# Altium PCB YAVP.PcbDoc (part 1 of 4)
Units mil, origin at the board's own origin, x right, y up, seen from the top; angles counter-clockwise.
Board outline 3188.93 x 2893.7 mil, 6 copper layers (Top Layer, Top, Mid-Layer 1, Top-Int, Mid-Layer 2, Bop-Int, Mid-Layer 3, Top-Mid, Mid-Layer 4, Bop-Mid, Bottom Layer, Bottom); 418 components, 278 nets, 1150 pads, 440 vias.
Unrouted connection lines stored in the file: 12.
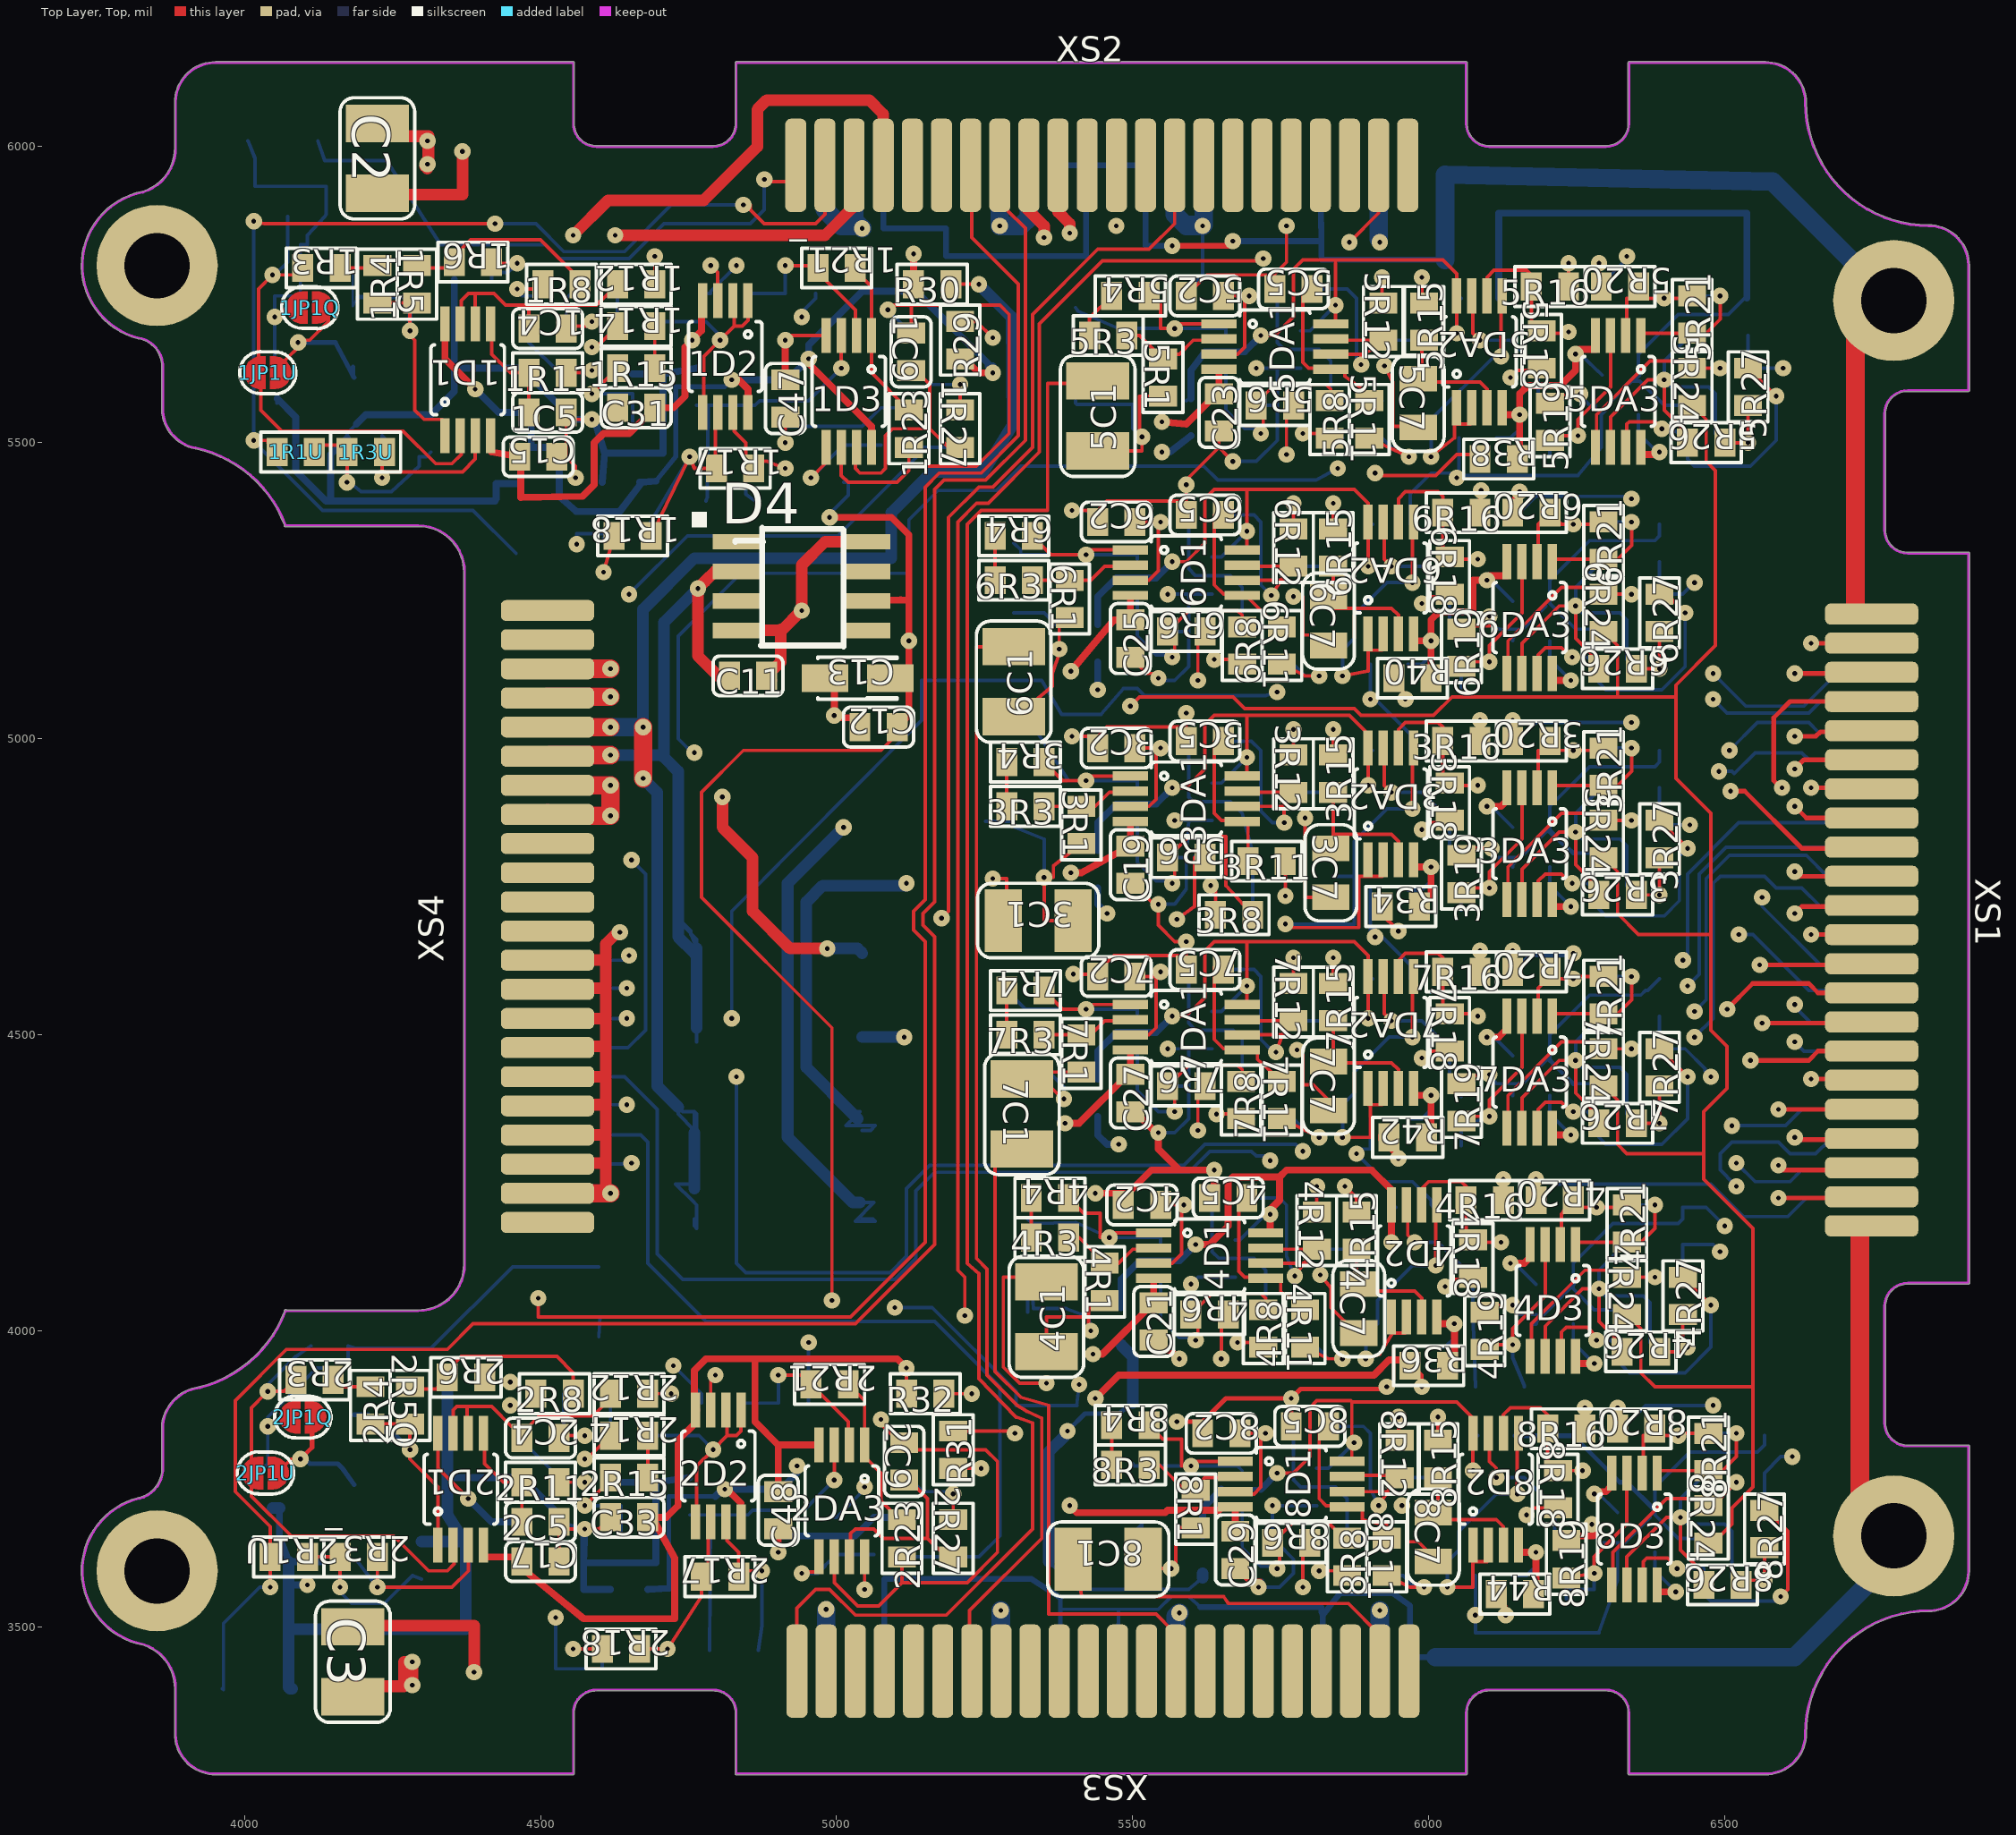
[diagram p0: Top Layer, Top view]
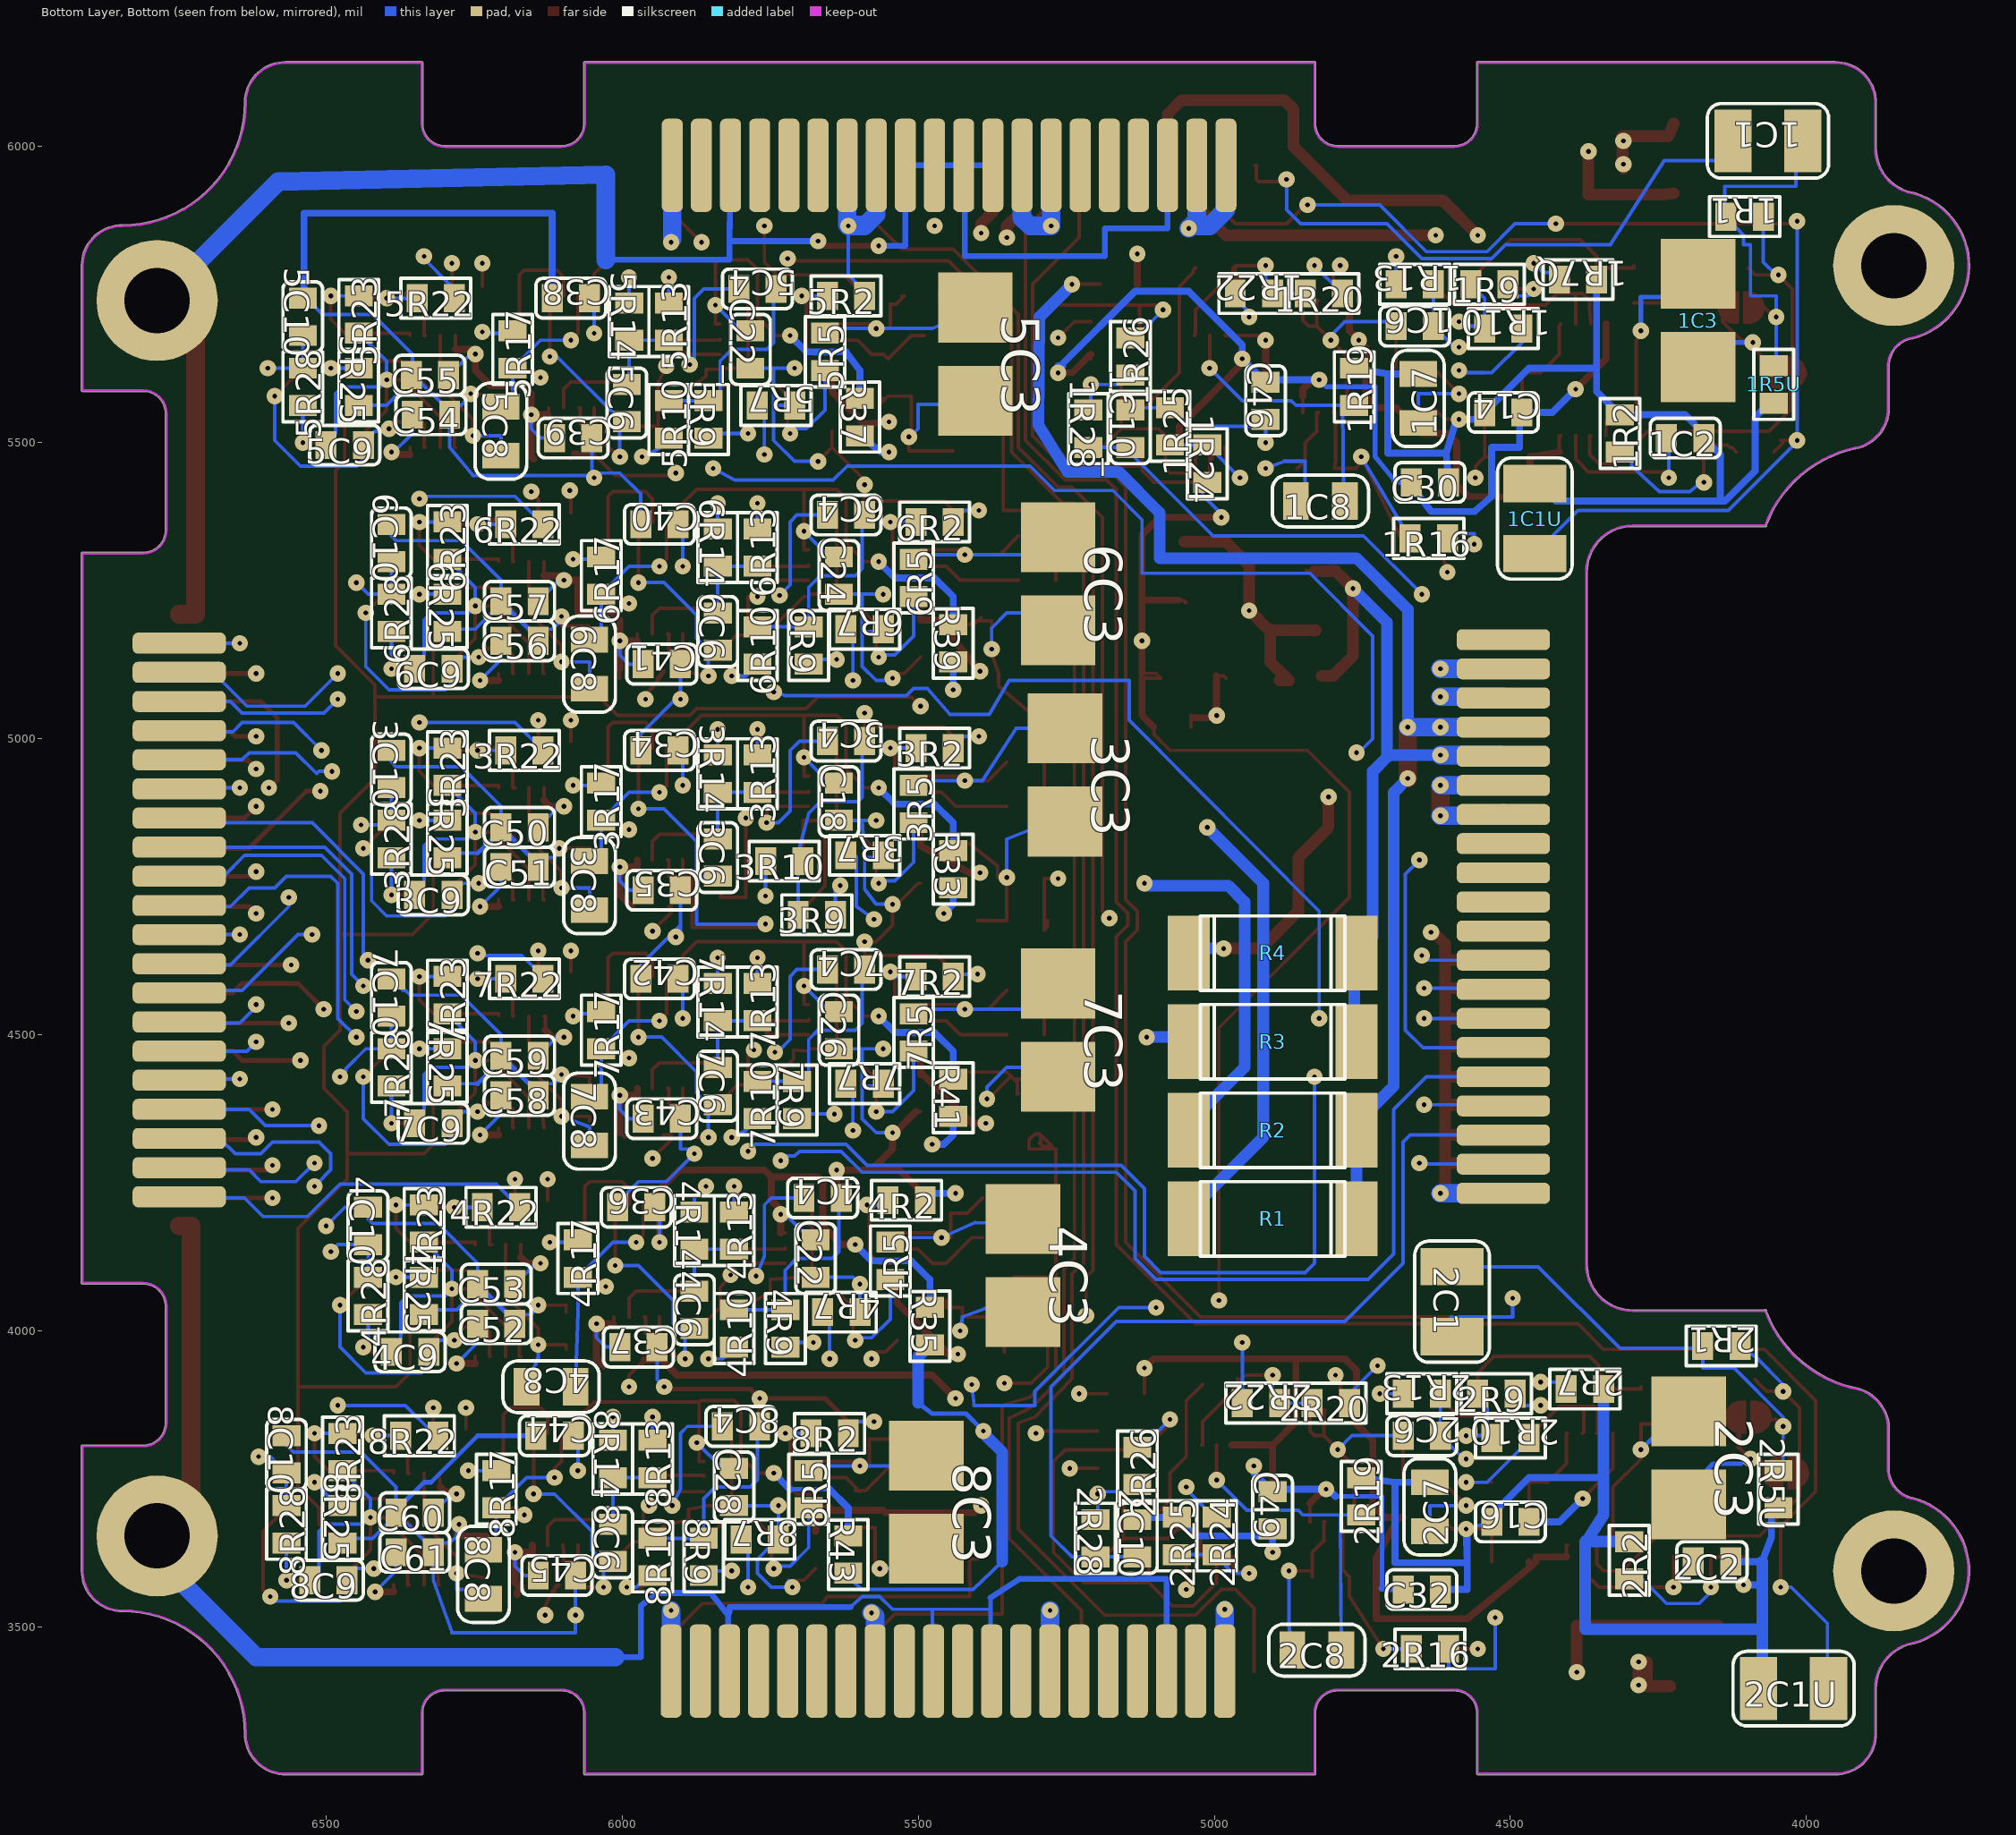
[diagram p1: Bottom Layer, Bottom view, seen from below]
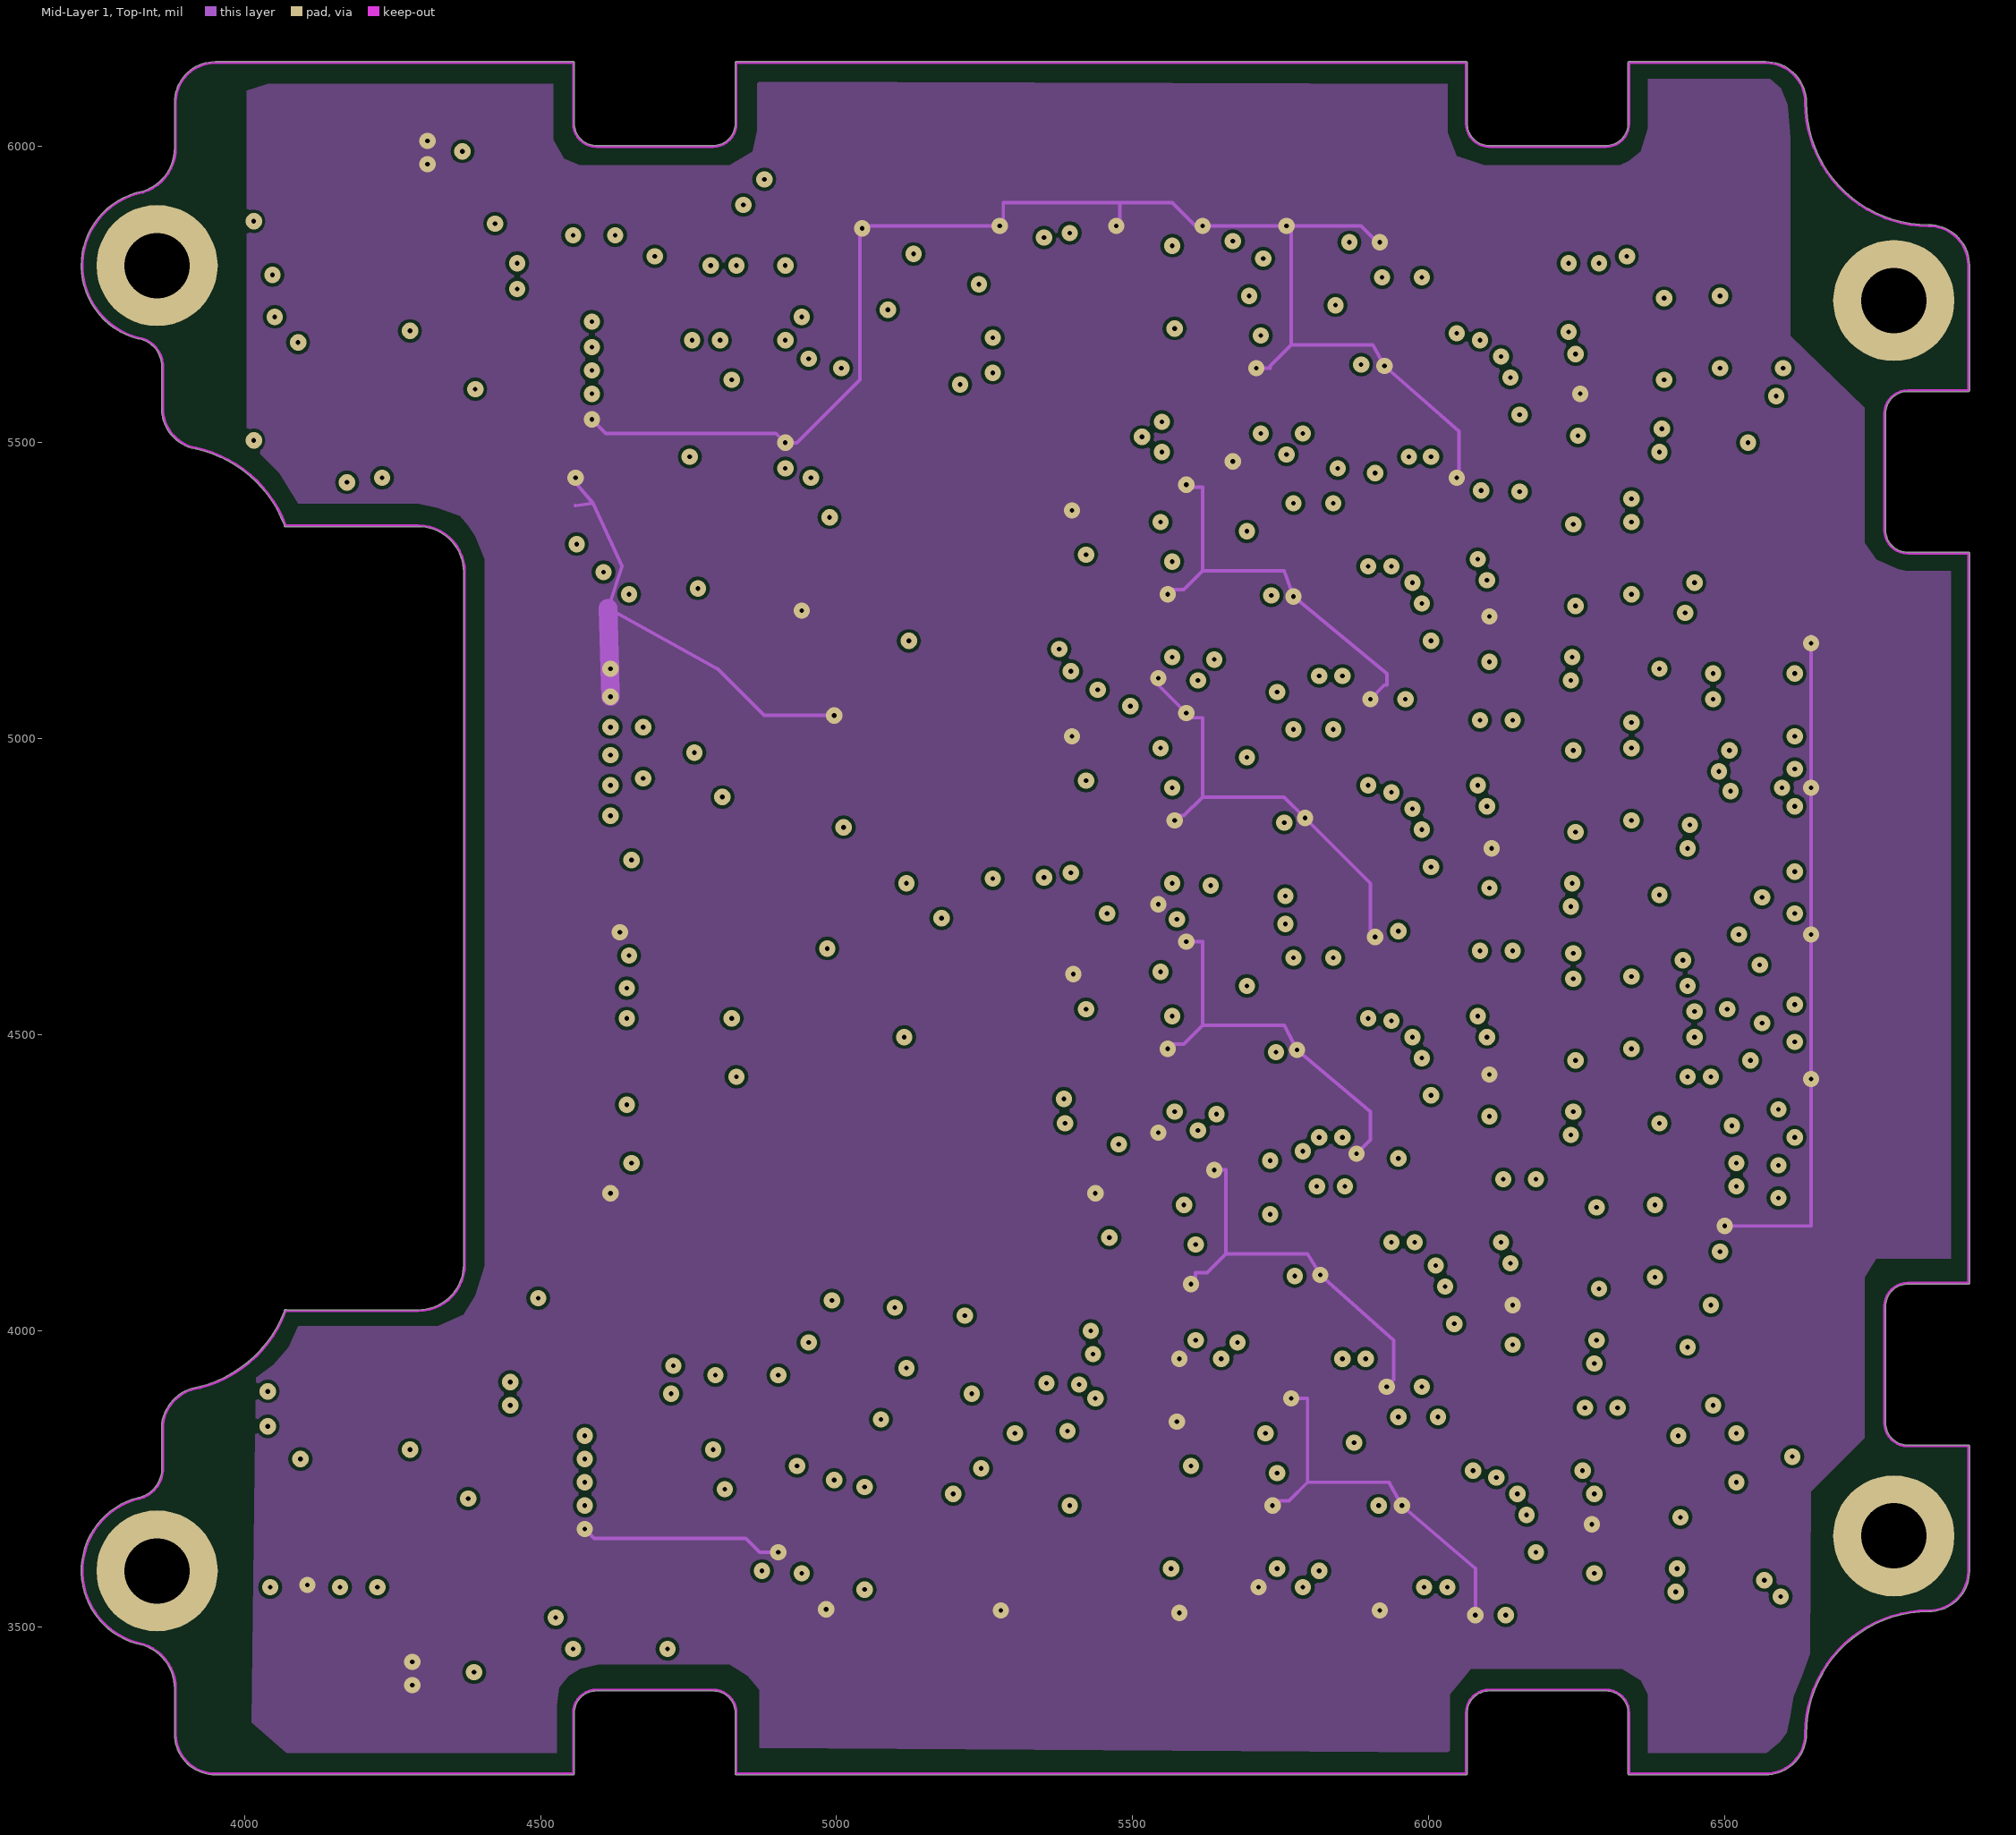
[diagram p2: Mid-Layer 1, Top-Int]
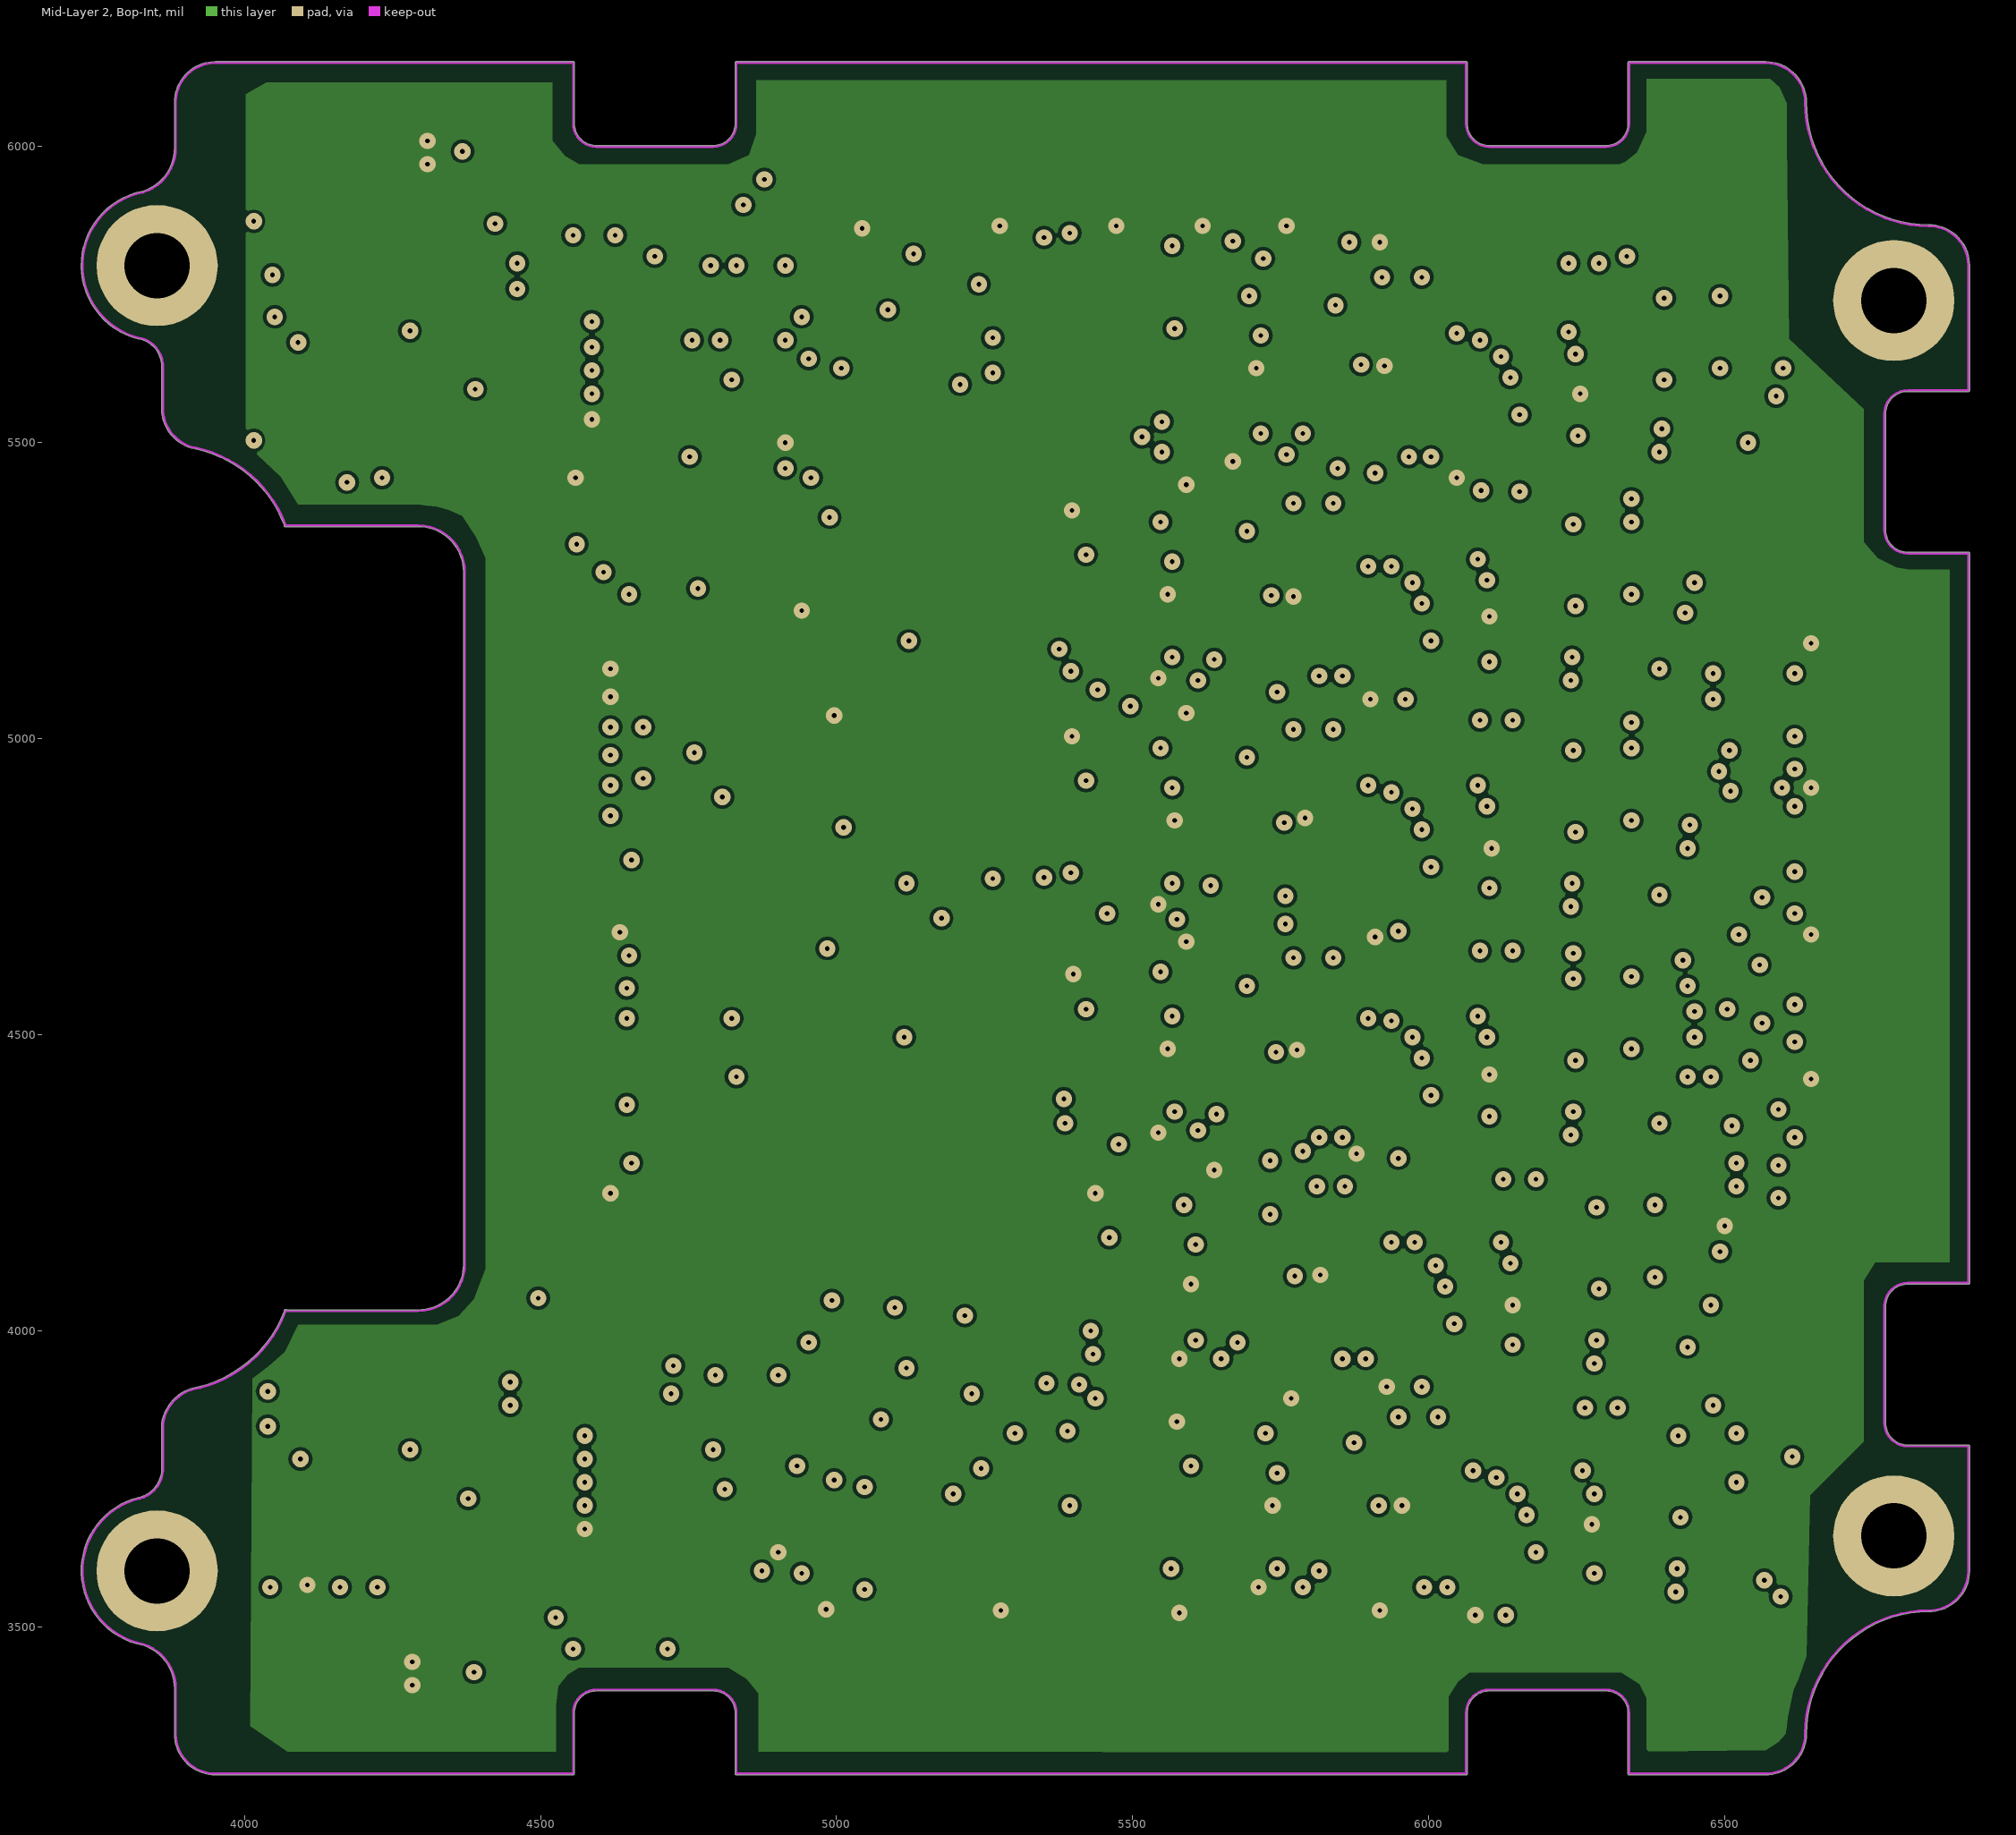
[diagram p3: Mid-Layer 2, Bop-Int]
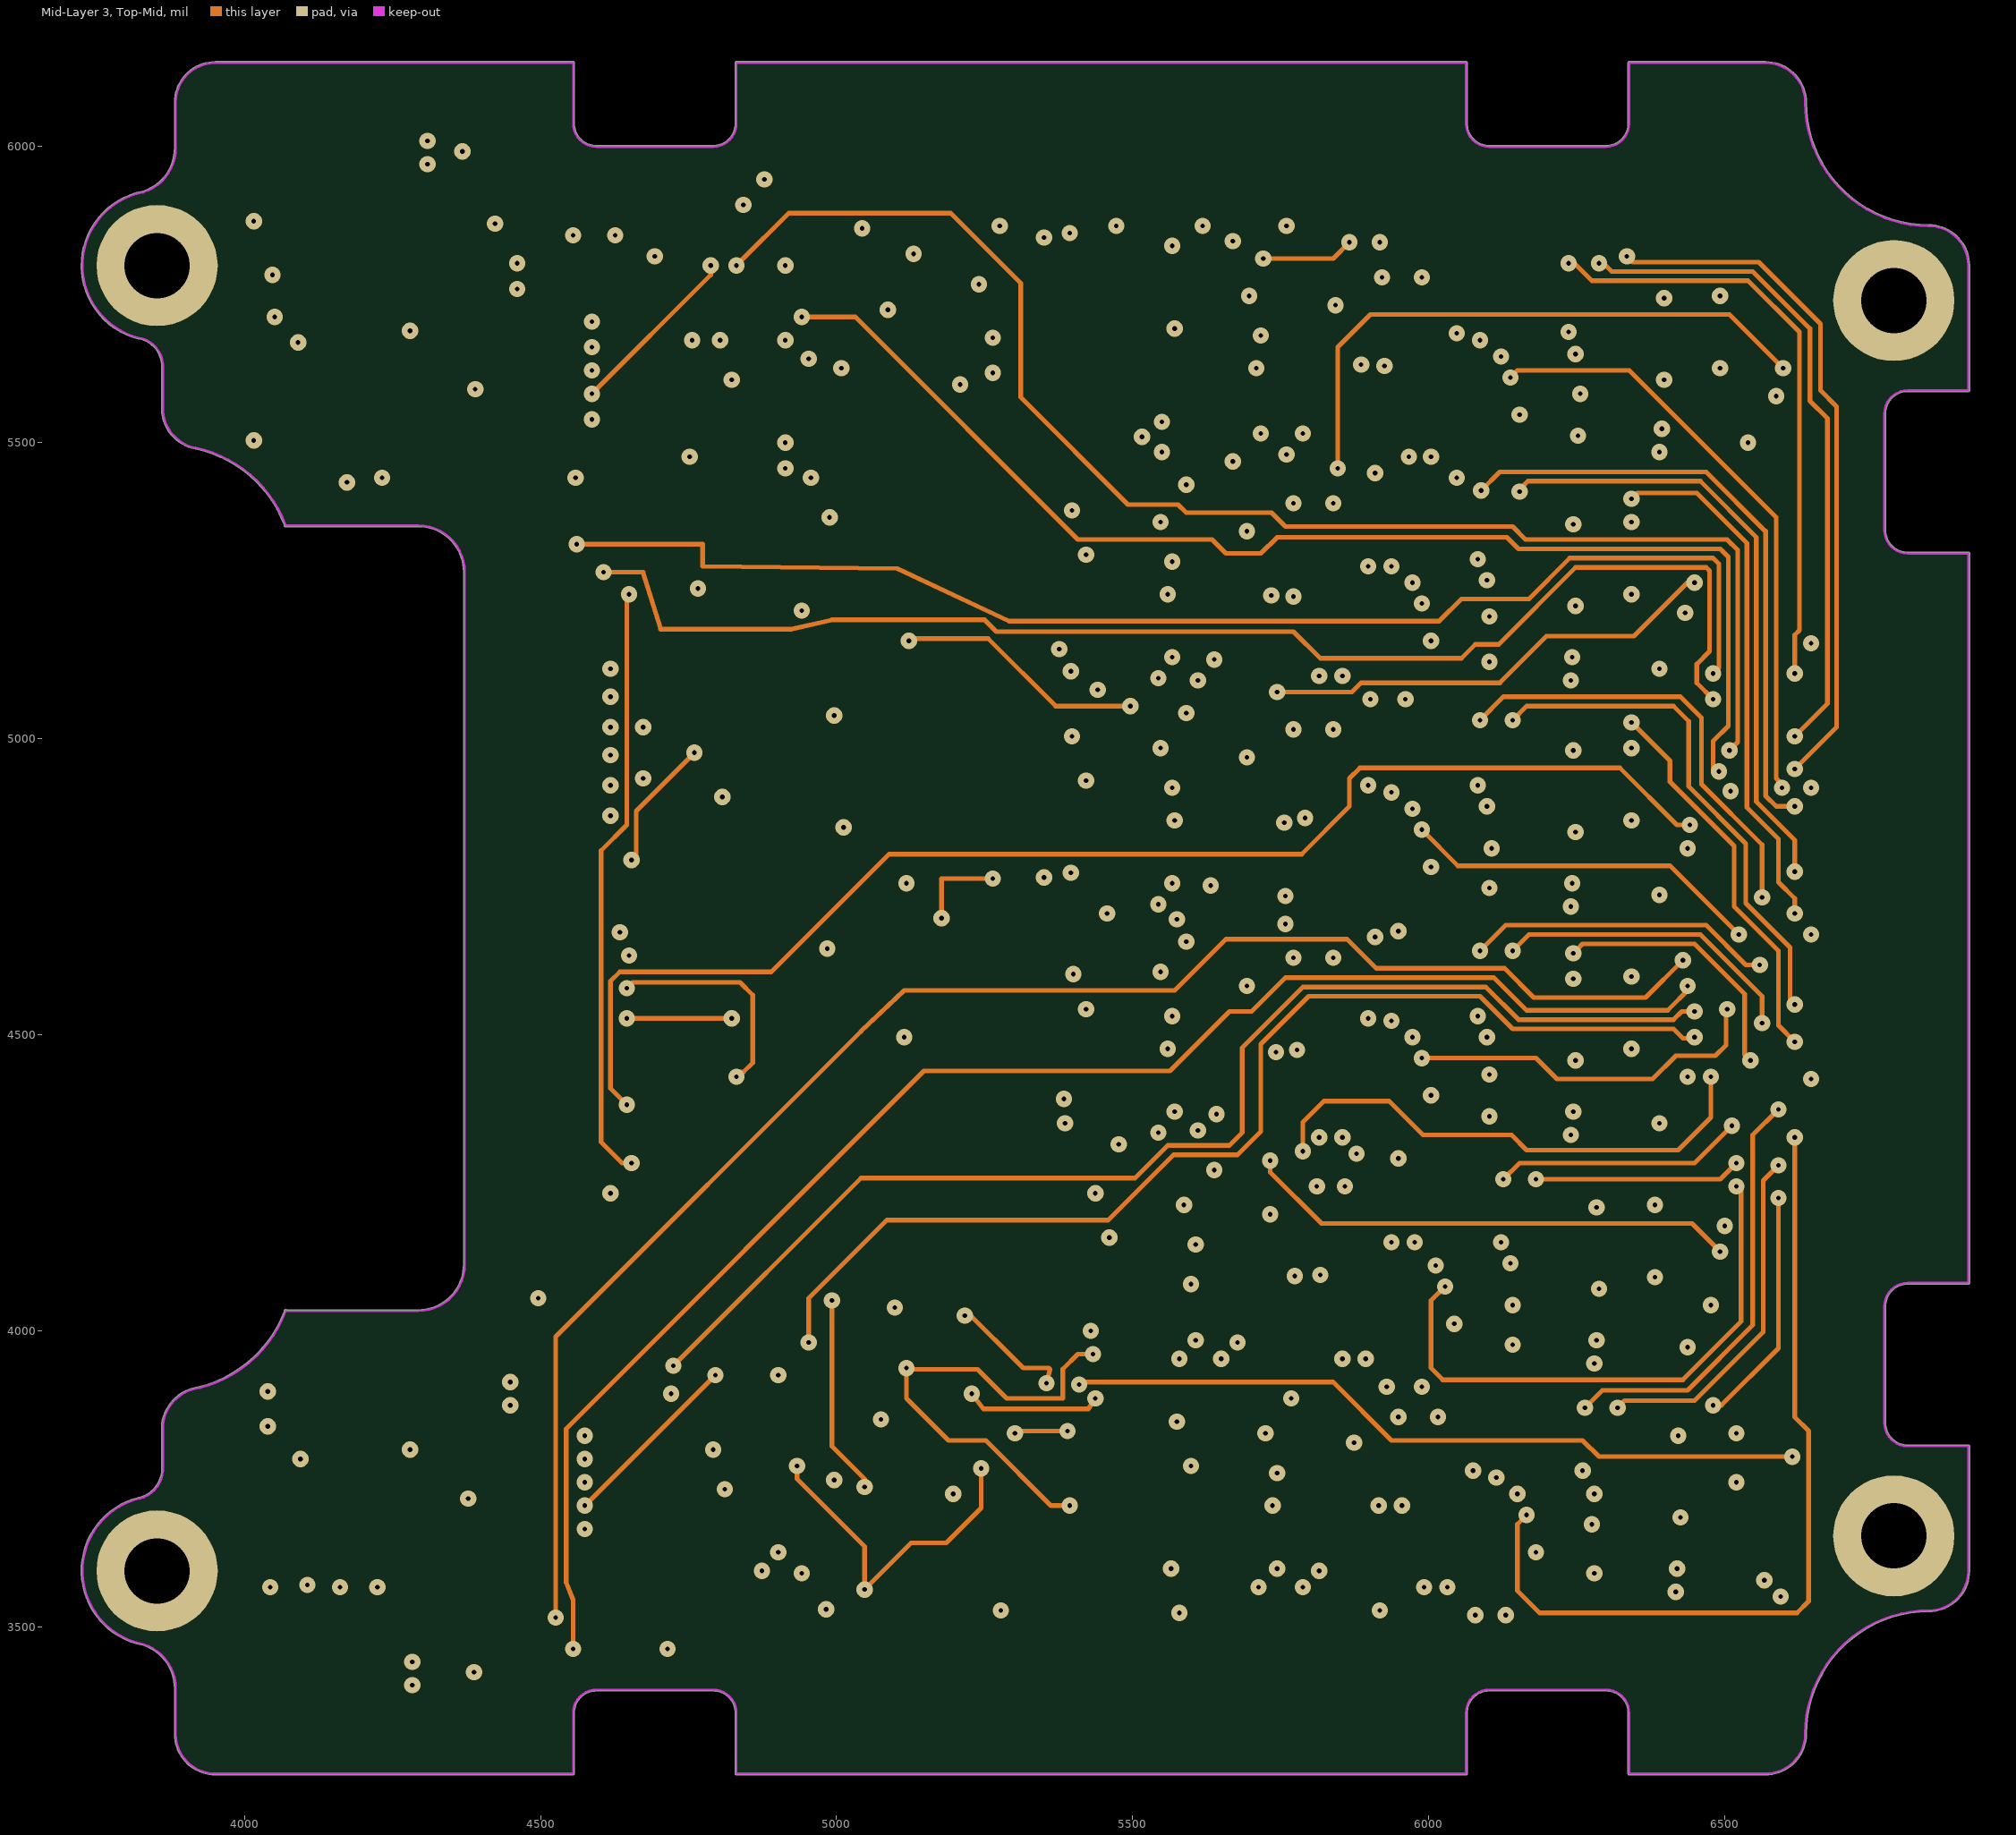
[diagram p4: Mid-Layer 3, Top-Mid]
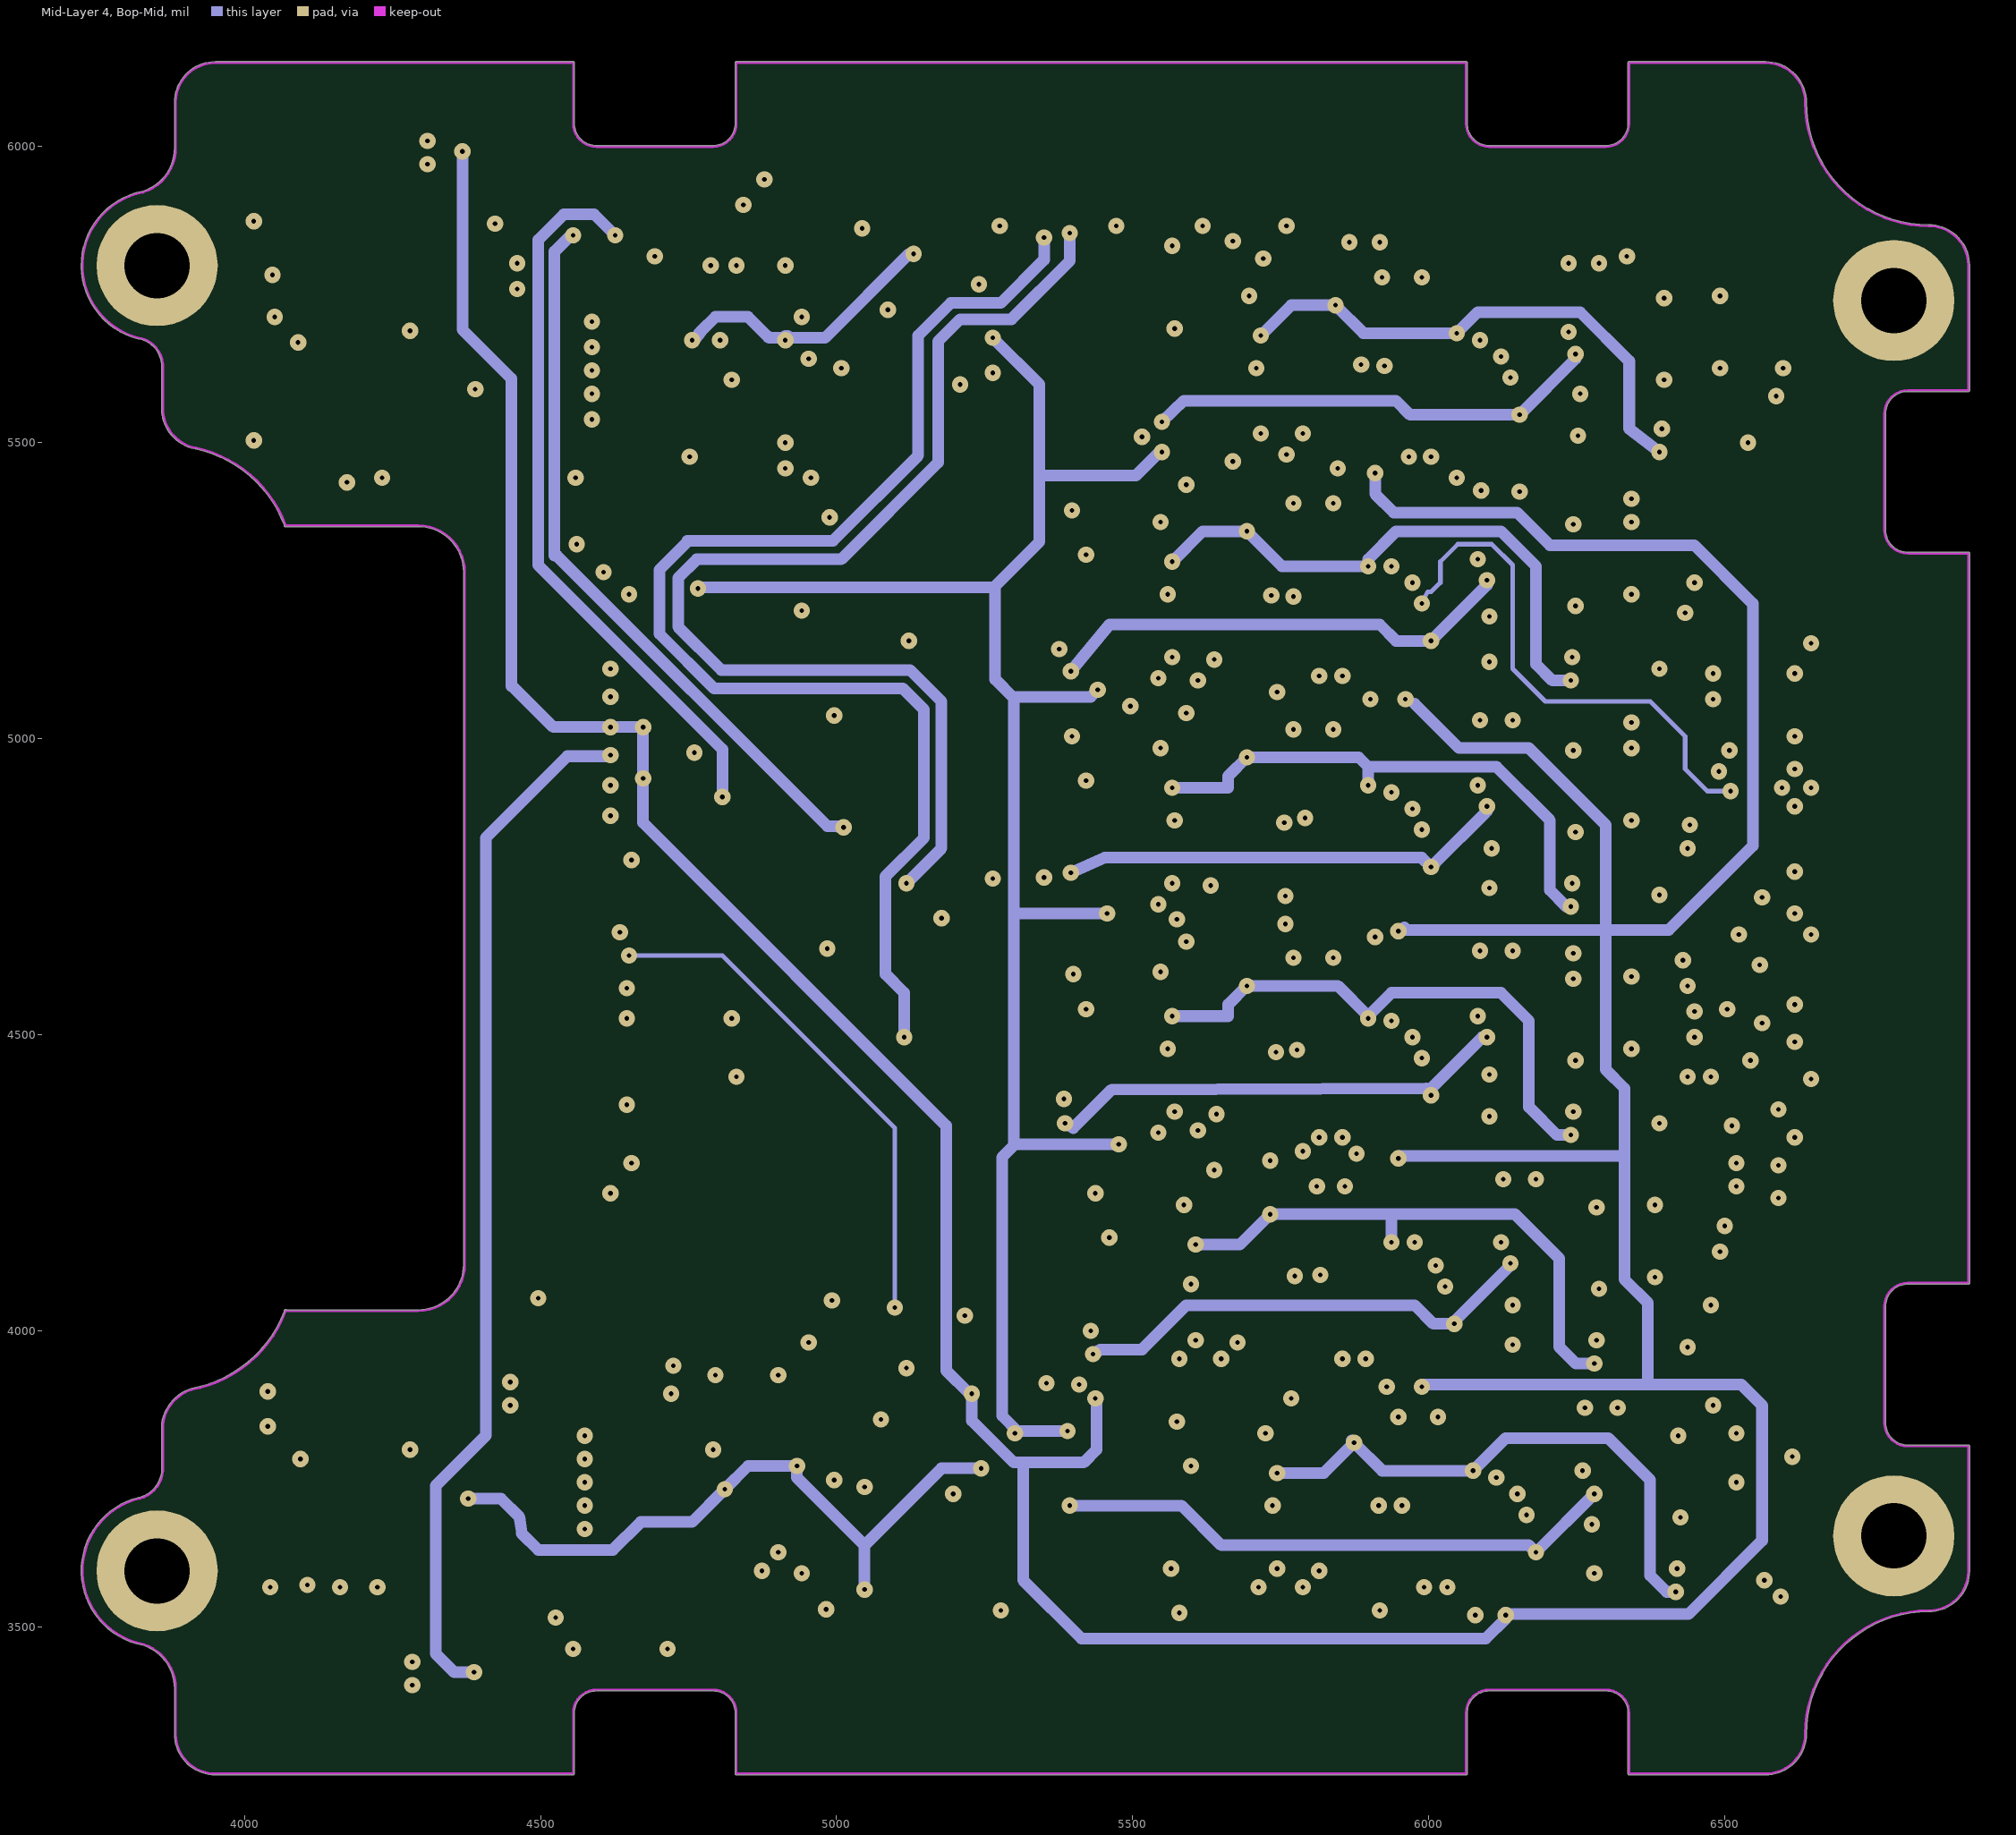
[diagram p5: Mid-Layer 4, Bop-Mid]

## Layer stack, top to bottom
Top Solder, Top Mask: solder mask 0.4, Solder Resist, Dk 3.5
Top Layer, Top: signal copper 1.4
Dielectric 1: dielectric 12.6, FR-4, Dk 4.8
Mid-Layer 1, Top-Int: signal copper 1.4
Dielectric2: dielectric 12.6, FR-4, Dk 4.8
Mid-Layer 2, Bop-Int: signal copper 1.4
Dielectric3: dielectric 12.6, FR-4, Dk 4.8
Mid-Layer 3, Top-Mid: signal copper 1.4
Dielectric4: dielectric 12.6, FR-4, Dk 4.8
Mid-Layer 4, Bop-Mid: signal copper 1.4
Dielectric5: dielectric 12.6, FR-4, Dk 4.8
Bottom Layer, Bottom: signal copper 1.4
Bottom Solder, Bot Mask: solder mask 0.4, Solder Resist, Dk 3.5

## Board outline
3820.33,5675.34 cw(c3852.36,5799.21) 3828.39,5924.9 3828.55,5924.92 ccw(c3805.12,5998.03) 3881.89,5998 3881.89,5998.03 3881.89,6074.8 cw(c3950.79,6074.8) 3950.79,6143.7 4555.12,6143.7 cw(c4555.12,6141.73) 4557.09,6141.73 4557.09,6039.37 ccw(c4594.49,6039.37) 4594.49,6001.97 4791.34,6001.97 ccw(c4791.34,6039.37) 4828.74,6039.37 4828.74,6141.73 cw(c4830.71,6141.73) 4830.71,6143.7 6062.99,6143.7 cw(c6062.99,6141.73) 6064.96,6141.73 6064.96,6039.37 ccw(c6102.36,6039.37) 6102.36,6001.97 6299.21,6001.97 ccw(c6299.21,6039.37) 6336.61,6039.37 6336.61,6141.73 cw(c6338.58,6141.73) 6338.58,6143.7 6568.9,6143.7 cw(c6568.9,6074.8) 6637.8,6074.8 ccw(c6844.49,6074.8) 6844.49,5868.11 cw(c6844.49,5799.21) 6913.39,5799.21 6913.39,5588.58 cw(c6911.42,5588.58) 6911.42,5586.61 6809.06,5586.61 ccw(c6809.06,5549.21) 6771.65,5549.21 6771.65,5352.36 ccw(c6809.06,5352.36) 6809.06,5314.96 6911.42,5314.96 cw(c6911.42,5312.99) 6913.39,5312.99 6913.39,4080.71 cw(c6911.42,4080.71) 6911.42,4078.74 6809.06,4078.74 ccw(c6809.06,4041.34) 6771.65,4041.34 6771.65,3844.49 ccw(c6809.06,3844.49) 6809.06,3807.09 6911.42,3807.09 cw(c6911.42,3805.12) 6913.39,3805.12 6913.39,3594.49 cw(c6844.49,3594.49) 6844.49,3525.59 ccw(c6844.49,3318.9) 6637.8,3318.9 cw(c6568.9,3318.9) 6568.9,3250 6338.58,3250 cw(c6338.58,3251.97) 6336.61,3251.97 6336.61,3354.33 ccw(c6299.21,3354.33) 6299.21,3391.73 6102.36,3391.73 ccw(c6102.36,3354.33) 6064.96,3354.33 6064.96,3251.97 cw(c6062.99,3251.97) 6062.99,3250 4830.71,3250 cw(c4830.71,3251.97) 4828.74,3251.97 4828.74,3354.33 ccw(c4791.34,3354.33) 4791.34,3391.73 4594.49,3391.73 ccw(c4594.49,3354.33) 4557.09,3354.33 4557.09,3251.97 cw(c4555.12,3251.97) 4555.12,3250 3950.79,3250 cw(c3950.79,3318.9) 3881.89,3318.9 3881.89,3395.67 ccw(c3805.12,3395.67) 3828.55,3468.78 3828.39,3468.8 cw(c3852.36,3594.49) 3821.41,3718.64 3822.68,3718.53 ccw(c3809.37,3767.77) 3860.31,3765.2 3860.24,3765.75 3860.24,3842.24 3860.18,3843.05 cw(c3933.07,3832.68) 3924,3905.74 3924.02,3905.74 ccw(c3874.02,4106.3) 4067.13,4032.61 cw(c4068.9,4033.46) 4068.4,4035.37 cw(c4069.72,4033.91) 4070.96,4035.43 4293.31,4035.43 ccw(c4293.31,4112.2) 4370.08,4112.2 4370.08,5281.5 ccw(c4293.31,5281.5) 4293.31,5358.27 4070.96,5358.27 cw(c4069.72,5359.79) 4068.4,5358.33 cw(c4068.9,5360.24) 4067.13,5361.1 ccw(c3874.02,5287.4) 3918.02,5489.36 3916.76,5489.2 cw(c3931.1,5559.06) 3860.65,5548.01 3860.24,5549.21 3860.24,5627.95 3860.32,5628.52 3860.32,5628.89 ccw(c3813.03,5628.89) 3821.54,5675.41

## Design rules (kind name [scope] priority, off if disabled: settings)
Clearance "Clearance_Mid-Layer 1, Top-Int" [ExistsOnLayer('Mid-Layer 1, Top-Int') vs ExistsOnLayer('Mid-Layer 1, Top-Int')] p1: gap=5.91 ignorepadtopadclearanceinfootprint=FALSE except(7.87: Arc-Arc Arc-Track Arc-THPad Arc-Via Track-Track Track-THPad Track-Via THPad-THPad THPad-Via Via-Via)
Clearance "Clearance_Mid-Layer 2, Bop-Int" [ExistsOnLayer('Mid-Layer 2, Bop-Int') vs ExistsOnLayer('Mid-Layer 2, Bop-Int')] p2: gap=5.91 ignorepadtopadclearanceinfootprint=FALSE except(7.87: Arc-Arc Arc-Track Arc-THPad Arc-Via Track-Track Track-THPad Track-Via THPad-THPad THPad-Via Via-Via)
Clearance "Clearance_Mid-Layer 3, Top-Mid" [ExistsOnLayer('Mid-Layer 3, Top-Mid') vs ExistsOnLayer('Mid-Layer 3, Top-Mid')] p3: gap=5.91 ignorepadtopadclearanceinfootprint=FALSE except(7.87: Arc-Arc Arc-Track Arc-THPad Arc-Via Track-Track Track-THPad Track-Via THPad-THPad THPad-Via Via-Via)
Clearance "Clearance_Mid-Layer 4, Bop-Mid" [ExistsOnLayer('Mid-Layer 4, Bop-Mid') vs ExistsOnLayer('Mid-Layer 4, Bop-Mid')] p4: gap=5.91 ignorepadtopadclearanceinfootprint=FALSE except(7.87: Arc-Arc Arc-Track Arc-THPad Arc-Via Track-Track Track-THPad Track-Via THPad-THPad THPad-Via Via-Via)
Clearance [All] p5: gap=10 ignorepadtopadclearanceinfootprint=FALSE except(0: Arc-Hole Track-Hole SMDPad-Hole THPad-Hole Via-Hole Fill-Hole Poly-Hole Region-Hole Text-Hole; 5.91: Arc-Arc Arc-Track Arc-THPad Arc-Via Track-Track Track-THPad Track-Via THPad-THPad THPad-Via Via-Via)
PlaneClearance [All] p1: clearance=10
PolygonConnect PolygonConnect_4 [IsPolygon And InNet('GND') And OnLayer('Mid-Layer 2, Bop-Int') vs IsVia] p1: connectstyle=Direct reliefconductorwidth=15 reliefentries=4 polygonreliefangle="90 Angle" airgapwidth=10
PolygonConnect PolygonConnect_3 [IsPolygon And InNet('GND') And OnLayer('Mid-Layer 2, Bop-Int') vs IsPad] p2: connectstyle=Direct reliefconductorwidth=15 reliefentries=4 polygonreliefangle="90 Angle" airgapwidth=10
PolygonConnect PolygonConnect_2 [IsPolygon And InNet('GND') And OnLayer('Mid-Layer 1, Top-Int') vs IsVia] p3: connectstyle=Direct reliefconductorwidth=15 reliefentries=4 polygonreliefangle="90 Angle" airgapwidth=10
PolygonConnect PolygonConnect_1 [IsPolygon And InNet('GND') And OnLayer('Mid-Layer 1, Top-Int') vs IsPad] p4: connectstyle=Direct reliefconductorwidth=15 reliefentries=4 polygonreliefangle="90 Angle" airgapwidth=10
PolygonConnect [All] p5: connectstyle=Relief reliefconductorwidth=10 reliefentries=4 polygonreliefangle="90 Angle" airgapwidth=10
RoutingVias [All] p1: holewidth=28 width=50 viastyle="Through Hole" minholewidth=28 minwidth=50 maxholewidth=28 maxwidth=50
SolderMaskExpansion [All] p1: expansion=4 istentingtop=FALSE
Width [All] p1: maxlimit=10 minlimit=10 preferedwidth=10
29 further rules are at their usual default settings.

## Components (designator, comment, footprint, x,y, rotation, side; value= is the part's Value field where it differs from the comment)
1C1 "0,47" C_1210 4064.96,6009.84 r0 bottom
1C1U "0,47" C_1210 4458.66,5372.05 r270 bottom
1C2 "0,033" C_0603 4204.72,5507.87 r180 bottom
1C3 "" C_K1043_64X32 4179.13,5785.43 r270 bottom
1C4 "0,0047" C_0603 4511.81,5692.91 r180 top
1C5 "0,00013" C_0603 4511.81,5551.18 r0 top
1C6 "0,0047" C_0603 4661.42,5696.85 r0 bottom
1C7 "0,0024" C_0805 4655.51,5574.8 r90 bottom
1C8 "0,15" C_0805 4820.87,5401.57 r180 bottom
1C9 "51pF" C_0603 5125.98,5653.54 r270 top
1C10_ "0,003" C_0603 5141.73,5523.62 r270 bottom
1D1 "AD822" DD_TSOP8 4338.58,5511.81 r90 top
1D2 "AD822" DD_TSOP8 4850.39,5740.16 r270 top
1D3 "AD822" DD_TSOP8 5059.06,5681.1 r270 top
1JP1Q "" X_JP-PCB1.4 4110.24,5728.35 r0 top
1JP1U "" X_JP-PCB1.4 4039.37,5618.11 r0 top
1R1 "200к" R_0603 4104.33,5881.89 r0 bottom
1R1U "200к" R_0603 4086.61,5484.25 r180 top
1R2 "1,82М" R_0603 4314.96,5515.75 r90 bottom
1R3 "200к" R_0603 4129.92,5795.28 r180 top
1R3U "200к" R_0603 4204.72,5484.25 r180 top
1R4 "4,02к" R_0603 4224.41,5767.72 r90 top
1R5 "40,2к" R_0603 4291.34,5767.72 r270 top
1R5U "40,2к" R_0603 4055.12,5598.43 r270 bottom
1R6 "1к" R_0603 4385.83,5805.12 r180 top
1R7Q "4,02к" R_0603 4385.83,5775.59 r0 bottom
1R8 "84,5к" R_0603 4535.43,5767.72 r0 top
1R9 "6,19к" R_0603 4535.43,5767.72 r180 bottom
1R10 "6,19к" R_0603 4511.81,5692.91 r0 bottom
1R11 "84,5к" R_0603 4511.81,5618.11 r0 top
1R12 "34,8к" R_0603 4661.42,5767.72 r180 top
1R13 "3,32к" R_0603 4661.42,5767.72 r0 bottom
1R14 "3,32к" R_0603 4661.42,5696.85 r180 top
1R15 "34,8к" R_0603 4661.42,5625.98 r0 top
1R16 "30,1к" R_0603 4637.8,5338.58 r180 bottom
1R17 "30.1к" R_0603 4828.74,5456.69 r180 top
1R18 "10к" R_0603 4655.51,5342.52 r180 top
1R19 "154к" R_0603 4763.78,5594.49 r90 bottom
1R20 "4,27к" R_0603 4814.96,5751.97 r180 bottom
1R21_ "30,1к" R_0603 5000,5795.28 r180 top
1R22 "976" R_0603 4933.07,5751.97 r0 bottom
1R23 "30,1к" R_0603 5122.05,5523.62 r90 top
1R24 "30,1к" R_0603 5011.81,5464.57 r270 bottom
1R25 "30,1к" R_0603 5074.8,5527.56 r90 bottom
1R26 "30,1к" R_0603 5141.73,5645.67 r90 bottom
1R27 "100" R_0603 5208.66,5523.62 r270 top
1R28 "511" R_0603 5212.6,5523.62 r270 bottom
2C1 "0,47" C_1210 4598.43,4049.21 r270 bottom
2C1U "0,47" C_1210 4021.65,3395.67 r180 bottom
2C2 "0,033" C_0603 4159.45,3610.24 r180 bottom
2C3 "" C_K1043_64X32 4194.88,3864.17 r270 bottom
2C4 "0,0047" C_0603 4500,3818.9 r180 top
2C5 "0,00013" C_0603 4500,3677.17 r0 top
2C6 "0,0047" C_0603 4649.61,3822.83 r0 bottom
2C7 "0,0024" C_0805 4635.83,3702.76 r90 bottom
2C8 "0,15" C_0805 4826.77,3460.63 r180 bottom
2C9 "51pF" C_0603 5114.17,3779.53 r270 top
2C10 "0,003" C_0603 5129.92,3649.61 r270 bottom
2D1 "AD822" DD_TSOP8 4326.77,3637.8 r90 top
2D2 "AD822" DD_TSOP8 4838.58,3866.14 r270 top
2DA3 "AD822" DD_TSOP8 5047.24,3807.09 r270 top
2JP1Q "" X_JP-PCB1.4 4098.43,3854.33 r0 top
2JP1U "" X_JP-PCB1.4 4035.43,3759.84 r0 top
2R1 "200к" R_0603 4143.7,3974.41 r0 bottom
2R1U "200к" R_0603 4074.8,3618.11 r180 top
2R2 "1,82М" R_0603 4299.21,3612.2 r90 bottom
2R3 "200к" R_0603 4118.11,3917.32 r180 top
2R3_ "200к" R_0603 4192.91,3618.11 r180 top
2R4 "4,02к" R_0603 4212.6,3874.02 r90 top
2R5Q "40,2к" R_0603 4279.53,3874.02 r270 top
2R5U "40,2к" R_0603 4047.24,3732.28 r270 bottom
2R6 "1к" R_0603 4374.02,3921.26 r180 top
2R7 "4,02к" R_0603 4374.02,3901.57 r0 bottom
2R8 "84,5к" R_0603 4523.62,3893.7 r0 top
2R9 "6,19к" R_0603 4523.62,3893.7 r180 bottom
2R10 "6,19к" R_0603 4500,3818.9 r0 bottom
2R11 "84,5к" R_0603 4500,3744.09 r0 top
2R12 "34,8к" R_0603 4649.61,3893.7 r180 top
2R13 "3,32к" R_0603 4649.61,3893.7 r0 bottom
2R14 "3,32к" R_0603 4649.61,3822.83 r180 top
2R15 "34,8к" R_0603 4649.61,3751.97 r0 top
2R16 "30,1к" R_0603 4635.83,3462.6 r180 bottom
2R17 "30.1к" R_0603 4803.15,3584.65 r180 top
2R18 "10к" R_0603 4635.83,3462.6 r180 top
2R19 "154к" R_0603 4751.97,3720.47 r90 bottom
2R20 "4,27к" R_0603 4803.15,3877.95 r180 bottom
2R21 "30,1к" R_0603 4988.19,3909.45 r180 top
2R22 "976" R_0603 4921.26,3877.95 r0 bottom
2R23 "30,1к" R_0603 5110.24,3649.61 r90 top
2R24 "30,1к" R_0603 4996.06,3653.54 r90 bottom
2R25 "30,1к" R_0603 5062.99,3653.54 r90 bottom
2R26 "30,1к" R_0603 5129.92,3771.65 r90 bottom
2R27 "100" R_0603 5196.85,3649.61 r270 top
2R28 "511" R_0603 5200.79,3649.61 r270 bottom
3C1 "0,47" C_1210 5340.55,4692.91 r180 top
3C2 "0,033" C_0603 5472.44,4984.25 r180 top
3C3 "" C_K1043_64X32 5248.03,5017.72 r270 bottom
3C4 "0,0047" C_0603 5622.05,4996.06 r0 bottom
3C5 "0,00013" C_0603 5622.05,4996.06 r180 top
3C6 "0,0047" C_0603 5838.58,4799.21 r270 bottom
3C7 "0,0024" C_0805 5834.65,4773.62 r270 top
3C8 "0,15" C_0805 6055.12,4751.97 r270 bottom
3C9 "51pF" C_0603 6318.9,4736.22 r180 bottom
3C10 "0,003" C_0603 6389.76,4948.82 r270 bottom
3DA1 "AD822" DD_TSOP8 5496.06,4937.01 r0 top
3DA2 "AD822" DD_TSOP8 5897.64,4795.28 r90 top
3DA3 "AD822" DD_TSOP8 6208.66,4917.32 r270 top
3R1 "200к" R_0603 5413.39,4854.33 r270 top
3R2 "200к" R_0603 5472.44,4984.25 r180 bottom
3R3 "200к" R_0603 5318.9,4885.83 r0 top
3R4 "4,02к" R_0603 5318.9,4960.63 r180 top
3R5 "40,2к" R_0603 5507.87,4889.76 r90 bottom
3R6 "1к" R_0603 5590.55,4799.21 r180 top
3R7 "4,02к" R_0603 5590.55,4803.15 r0 bottom
3R8 "84,5к" R_0603 5671.26,4702.76 r0 top
3R9 "6,19к" R_0603 5671.26,4702.76 r180 bottom
3R10 "6,19к" R_0603 5726.38,4793.31 r180 bottom
3R11 "84,5к" R_0603 5726.38,4793.31 r0 top
3R12 "34,8к" R_0603 5771.65,4940.94 r270 top
3R13 "3,32к" R_0603 5771.65,4940.94 r90 bottom
3R14 "3,32к" R_0603 5838.58,4940.94 r270 bottom
3R15 "34,8к" R_0603 5838.58,4940.94 r90 top
3R16 "30,1к" R_0603 6055.12,4996.06 r0 top
3R17 "30.1к" R_0603 6035.43,4893.7 r90 bottom
3R18 "10к" R_0603 6035.43,4893.7 r270 top
3R19 "154к" R_0603 6055.12,4771.65 r90 top
3R20 "4,27к" R_0603 6173.23,4996.06 r180 top
3R21 "30,1к" R_0603 6295.28,4952.76 r90 top
3R22 "976" R_0603 6165.35,4980.31 r180 bottom
3R23 "30,1к" R_0603 6295.28,4952.76 r90 bottom
3R24 "30,1к" R_0603 6295.28,4830.71 r270 top
3R25 "30,1к" R_0603 6295.28,4830.71 r270 bottom
3R26 "30,1к" R_0603 6318.9,4736.22 r180 top
3R27 "100" R_0603 6389.76,4830.71 r90 top
3R28 "511" R_0603 6389.76,4830.71 r90 bottom
4C1 "0,47" C_1210 5354.33,4023.62 r90 top
4C2 "0,033" C_0603 5515.75,4212.6 r180 top
4C3 "" C_K1043_64X32 5318.9,4188.98 r270 bottom
4C4 "0,0047" C_0603 5661.42,4224.41 r0 bottom
4C5 "0,00013" C_0603 5661.42,4224.41 r180 top
4C6 "0,0047" C_0603 5877.95,4035.43 r270 bottom
4C7 "0,0024" C_0805 5881.89,4037.4 r270 top
4C8 "0,15" C_0805 6120.08,3905.51 r0 bottom
4C9 "51pF" C_0603 6358.27,3964.57 r180 bottom
4C10 "0,003" C_0603 6429.13,4177.17 r270 bottom
4D1 "AD822" DD_TSOP8 5535.43,4165.35 r0 top
4D2 "AD822" DD_TSOP8 5937.01,4023.62 r90 top
4D3 "AD822" DD_TSOP8 6248.03,4145.67 r270 top
4R1 "200к" R_0603 5452.76,4082.68 r270 top
4R2 "200к" R_0603 5519.69,4220.47 r180 bottom
4R3 "200к" R_0603 5360.24,4157.48 r0 top
4R4 "4,02к" R_0603 5360.24,4224.41 r180 top
4R5 "40,2к" R_0603 5547.24,4118.11 r90 bottom
4R6 "1к" R_0603 5629.92,4027.56 r180 top
4R7 "4,02к" R_0603 5629.92,4031.5 r0 bottom
4R8 "84,5к" R_0603 5720.47,4003.94 r90 top
4R9 "6,19к" R_0603 5724.41,4003.94 r270 bottom
4R10 "6,19к" R_0603 5811.02,4003.94 r90 bottom
4R11 "84,5к" R_0603 5791.34,4003.94 r270 top
4R12 "34,8к" R_0603 5811.02,4169.29 r270 top
4R13 "3,32к" R_0603 5811.02,4169.29 r90 bottom
4R14 "3,32к" R_0603 5877.95,4169.29 r270 bottom
4R15 "34,8к" R_0603 5877.95,4169.29 r90 top
4R16 "30,1к" R_0603 6094.49,4220.47 r0 top
4R17 "30.1к" R_0603 6074.8,4122.05 r90 bottom
4R18 "10к" R_0603 6074.8,4122.05 r270 top
4R19 "154к" R_0603 6094.49,4000 r90 top
4R20 "4,27к" R_0603 6212.6,4220.47 r180 top
4R21 "30,1к" R_0603 6334.65,4181.1 r90 top
4R22 "976" R_0603 6204.72,4208.66 r180 bottom
4R23 "30,1к" R_0603 6334.65,4181.1 r90 bottom
4R24 "30,1к" R_0603 6334.65,4059.06 r270 top
4R25 "30,1к" R_0603 6334.65,4059.06 r270 bottom
4R26 "30,1к" R_0603 6358.27,3964.57 r180 top
4R27 "100" R_0603 6429.13,4059.06 r90 top
4R28 "511" R_0603 6429.13,4059.06 r90 bottom
5C1 "0,47" C_1210 5440.94,5545.28 r90 top
5C2 "0,033" C_0603 5622.05,5748.03 r180 top
5C3 "" C_K1043_64X32 5399.61,5728.35 r270 bottom
5C4 "0,0047" C_0603 5771.65,5759.84 r0 bottom
5C5 "0,00013" C_0603 5771.65,5759.84 r180 top
5C6 "0,0047" C_0603 5992.13,5566.93 r270 bottom
5C7 "0,0024" C_0805 5982.28,5566.93 r270 top
5C8 "0,15" C_0805 6204.72,5519.69 r270 bottom
5C9 "51pF" C_0603 6468.5,5496.06 r180 bottom
5C10 "0,003" C_0603 6539.37,5712.6 r270 bottom
5DA1 "AD822" DD_TSOP8 5645.67,5700.79 r0 top
5DA2 "AD822" DD_TSOP8 6047.24,5559.06 r90 top
5DA3 "AD822" DD_TSOP8 6358.27,5681.1 r270 top
5R1 "200к" R_0603 5551.18,5610.24 r270 top
5R2 "200к" R_0603 5622.05,5748.03 r180 bottom
5R3 "200к" R_0603 5458.66,5681.1 r0 top
5R4 "4,02к" R_0603 5496.06,5748.03 r180 top
5R5 "40,2к" R_0603 5657.48,5653.54 r90 bottom
5R6 "1к" R_0603 5740.16,5562.99 r180 top
5R7 "4,02к" R_0603 5740.16,5562.99 r0 bottom
5R8 "84,5к" R_0603 5832.68,5539.37 r90 top
5R9 "6,19к" R_0603 5854.33,5539.37 r270 bottom
5R10 "6,19к" R_0603 5921.26,5539.37 r90 bottom
5R11 "84,5к" R_0603 5899.61,5539.37 r270 top
5R12 "34,8к" R_0603 5923.23,5704.72 r270 top
5R13 "3,32к" R_0603 5921.26,5704.72 r90 bottom
5R14 "3,32к" R_0603 5988.19,5704.72 r270 bottom
5R15 "34,8к" R_0603 5992.13,5704.72 r90 top
5R16 "30,1к" R_0603 6204.72,5763.78 r0 top
5R17 "30.1к" R_0603 6185.04,5657.48 r90 bottom
5R18 "10к" R_0603 6190.94,5657.48 r270 top
5R19 "154к" R_0603 6204.72,5535.43 r90 top
5R20 "4,27к" R_0603 6322.83,5763.78 r180 top
5R21 "30,1к" R_0603 6444.88,5716.54 r90 top
5R22 "976" R_0603 6314.96,5744.09 r180 bottom
5R23 "30,1к" R_0603 6444.88,5716.54 r90 bottom
5R24 "30,1к" R_0603 6444.88,5594.49 r270 top
5R25 "30,1к" R_0603 6444.88,5594.49 r270 bottom
5R26 "30,1к" R_0603 6468.5,5500 r180 top
5R27 "100" R_0603 6539.37,5594.49 r90 top
5R28 "511" R_0603 6539.37,5594.49 r90 bottom
6C1 "0,47" C_1210 5299.21,5096.46 r90 top
6C2 "0,033" C_0603 5472.44,5366.14 r180 top
6C3 "" C_K1043_64X32 5259.84,5340.55 r270 bottom
6C4 "0,0047" C_0603 5622.05,5377.95 r0 bottom
6C5 "0,00013" C_0603 5622.05,5377.95 r180 top
6C6 "0,0047" C_0603 5838.58,5181.1 r270 bottom
6C7 "0,0024" C_0805 5830.71,5198.82 r270 top
6C8 "0,15" C_0805 6055.12,5125.98 r270 bottom
6C9 "51pF" C_0603 6318.9,5118.11 r180 bottom
6C10 "0,003" C_0603 6389.76,5330.71 r270 bottom
6D1 "AD822" DD_TSOP8 5496.06,5318.9 r0 top
6DA2 "AD822" DD_TSOP8 5897.64,5177.17 r90 top
6DA3 "AD822" DD_TSOP8 6208.66,5299.21 r270 top
6R1 "200к" R_0603 5393.7,5236.22 r270 top
6R2 "200к" R_0603 5472.44,5366.14 r180 bottom
6R3 "200к" R_0603 5299.21,5267.72 r0 top
6R4 "4,02к" R_0603 5299.21,5342.52 r180 top
6R5 "40,2к" R_0603 5507.87,5271.65 r90 bottom
6R6 "1к" R_0603 5590.55,5181.1 r180 top
6R7 "4,02к" R_0603 5590.55,5185.04 r0 bottom
6R8 "84,5к" R_0603 5685.04,5157.48 r90 top
6R9 "6,19к" R_0603 5685.04,5157.48 r270 bottom
6R10 "6,19к" R_0603 5771.65,5157.48 r90 bottom
6R11 "84,5к" R_0603 5751.97,5157.48 r270 top
6R12 "34,8к" R_0603 5771.65,5322.83 r270 top
6R13 "3,32к" R_0603 5771.65,5322.83 r90 bottom
6R14 "3,32к" R_0603 5838.58,5322.83 r270 bottom
6R15 "34,8к" R_0603 5838.58,5322.83 r90 top
6R16 "30,1к" R_0603 6055.12,5381.89 r0 top
6R17 "30.1к" R_0603 6035.43,5275.59 r90 bottom
6R18 "10к" R_0603 6035.43,5275.59 r270 top
6R19 "154к" R_0603 6055.12,5153.54 r90 top
6R20 "4,27к" R_0603 6173.23,5381.89 r180 top
6R21 "30,1к" R_0603 6295.28,5334.65 r90 top
6R22 "976" R_0603 6165.35,5362.2 r180 bottom
6R23 "30,1к" R_0603 6295.28,5334.65 r90 bottom
6R24 "30,1к" R_0603 6295.28,5212.6 r270 top
6R25 "30,1к" R_0603 6295.28,5212.6 r270 bottom
6R26 "30,1к" R_0603 6318.9,5118.11 r180 top
6R27 "100" R_0603 6389.76,5212.6 r90 top
6R28 "511" R_0603 6389.76,5212.6 r90 bottom
7C1 "0,47" C_1210 5312.99,4366.14 r270 top
7C2 "0,033" C_0603 5472.44,4598.43 r180 top
7C3 "" C_K1043_64X32 5259.84,4586.61 r270 bottom
7C4 "0,0047" C_0603 5622.05,4610.24 r0 bottom
7C5 "0,00013" C_0603 5622.05,4610.24 r180 top
7C6 "0,0047" C_0603 5838.58,4413.39 r270 bottom
7C7 "0,0024" C_0805 5830.71,4413.39 r270 top
7C8 "0,15" C_0805 6055.12,4354.33 r270 bottom
7C9 "51pF" C_0603 6318.9,4350.39 r180 bottom
7C10 "0,003" C_0603 6389.76,4562.99 r270 bottom
7DA1 "AD822" DD_TSOP8 5496.06,4551.18 r0 top
7DA2 "AD822" DD_TSOP8 5897.64,4409.45 r90 top
7DA3 "AD822" DD_TSOP8 6208.66,4531.5 r270 top
7R1 "200к" R_0603 5413.39,4468.5 r270 top
7R2 "200к" R_0603 5472.44,4598.43 r180 bottom
7R3 "200к" R_0603 5318.9,4500 r0 top
7R4 "4,02к" R_0603 5318.9,4574.8 r180 top
7R5 "40,2к" R_0603 5507.87,4503.94 r90 bottom
7R6 "1к" R_0603 5590.55,4413.39 r180 top
7R7 "4,02к" R_0603 5590.55,4417.32 r0 bottom
7R8 "84,5к" R_0603 5683.07,4389.76 r90 top
7R9 "6,19к" R_0603 5704.72,4389.76 r270 bottom
7R10 "6,19к" R_0603 5771.65,4389.76 r90 bottom
7R11 "84,5к" R_0603 5751.97,4389.76 r270 top
7R12 "34,8к" R_0603 5771.65,4555.12 r270 top
7R13 "3,32к" R_0603 5771.65,4555.12 r90 bottom
7R14 "3,32к" R_0603 5838.58,4555.12 r270 bottom
7R15 "34,8к" R_0603 5838.58,4555.12 r90 top
7R16 "30,1к" R_0603 6055.12,4606.3 r0 top
7R17 "30.1к" R_0603 6035.43,4507.87 r90 bottom
7R18 "10к" R_0603 6035.43,4503.94 r270 top
7R19 "154к" R_0603 6055.12,4385.83 r90 top
7R20 "4,27к" R_0603 6173.23,4606.3 r180 top
7R21 "30,1к" R_0603 6295.28,4566.93 r90 top
7R22 "976" R_0603 6165.35,4594.49 r180 bottom
7R23 "30,1к" R_0603 6295.28,4566.93 r90 bottom
7R24 "30,1к" R_0603 6295.28,4444.88 r270 top
7R25 "30,1к" R_0603 6295.28,4444.88 r270 bottom
7R26 "30,1к" R_0603 6318.9,4350.39 r180 top
7R27 "100" R_0603 6389.76,4444.88 r90 top
7R28 "511" R_0603 6389.76,4444.88 r90 bottom
8C1 "0,47" C_1210 5458.66,3614.17 r180 top
8C2 "0,033" C_0603 5649.61,3826.77 r180 top
8C3 "" C_K1043_64X32 5482.28,3789.37 r270 bottom
8C4 "0,0047" C_0603 5799.21,3838.58 r0 bottom
8C5 "0,00013" C_0603 5799.21,3838.58 r180 top
8C6 "0,0047" C_0603 6015.75,3641.73 r270 bottom
8C7 "0,0024" C_0805 6007.87,3651.57 r270 top
8C8 "0,15" C_0805 6234.25,3588.58 r270 bottom
8C9 "51pF" C_0603 6496.06,3578.74 r180 bottom
8C10 "0,003" C_0603 6566.93,3791.34 r270 bottom
8D1 "AD822" DD_TSOP8 5673.23,3779.53 r0 top
8D2 "AD822" DD_TSOP8 6074.8,3637.8 r90 top
8D3 "AD822" DD_TSOP8 6385.83,3759.84 r270 top
8R1 "200к" R_0603 5606.3,3698.82 r270 top
8R2 "200к" R_0603 5649.61,3826.77 r180 bottom
8R3 "200к" R_0603 5496.06,3773.62 r0 top
8R4 "4,02к" R_0603 5496.06,3840.55 r180 top
8R5 "40,2к" R_0603 5685.04,3732.28 r90 bottom
8R6 "1к" R_0603 5767.72,3641.73 r180 top
8R7 "4,02к" R_0603 5767.72,3647.64 r0 bottom
8R8 "84,5к" R_0603 5862.2,3618.11 r90 top
8R9 "6,19к" R_0603 5862.2,3618.11 r270 bottom
8R10 "6,19к" R_0603 5948.82,3618.11 r90 bottom
8R11 "84,5к" R_0603 5929.13,3618.11 r270 top
8R12 "34,8к" R_0603 5950.79,3783.46 r270 top
8R13 "3,32к" R_0603 5948.82,3783.46 r90 bottom
8R14 "3,32к" R_0603 6015.75,3783.46 r270 bottom
8R15 "34,8к" R_0603 6015.75,3783.46 r90 top
8R16 "30,1к" R_0603 6232.28,3834.65 r0 top
8R17 "30.1к" R_0603 6212.6,3732.28 r90 bottom
8R18 "10к" R_0603 6218.5,3732.28 r270 top
8R19 "154к" R_0603 6232.28,3614.17 r90 top
8R20 "4,27к" R_0603 6350.39,3834.65 r180 top
8R21 "30,1к" R_0603 6472.44,3795.28 r90 top
8R22 "976" R_0603 6342.52,3822.83 r180 bottom
8R23 "30,1к" R_0603 6472.44,3795.28 r90 bottom
8R24 "30,1к" R_0603 6472.44,3673.23 r270 top
8R25 "30,1к" R_0603 6472.44,3673.23 r270 bottom
8R26 "30,1к" R_0603 6496.06,3570.87 r180 top
8R27 "100" R_0603 6566.93,3665.35 r90 top
8R28 "511" R_0603 6566.93,3673.23 r90 bottom
C2 "" C_1210 4224.41,5980.31 r270 top
C3 "" C_1210 4183.07,3440.94 r270 top
C11 "0,033" C_0603 4850.39,5106.3 r0 top
C12 "0,033" C_0603 5070.87,5019.69 r180 top
C13 "47,0" C_3216 5035.43,5102.36 r180 top
C14 "22" C_0603 4511.81,5551.18 r0 bottom
C15 "22" C_0603 4496.06,5476.38 r180 top
C16 "0,033" C_0603 4500,3677.17 r0 bottom
C17 "0,033" C_0603 4500,3610.24 r180 top
C18 "0,033" C_0603 5633.86,4893.7 r270 bottom
C19 "0,033" C_0603 5496.06,4787.4 r90 top
C21 "0,033" C_0603 5535.43,4015.75 r90 top
C22 "0,033" C_0603 5673.23,4122.05 r270 bottom
C22_ "0,033" C_0603 5783.46,5657.48 r270 bottom
C23 "0,033" C_0603 5645.67,5551.18 r90 top
C24 "0,033" C_0603 5633.86,5275.59 r270 bottom
C25 "0,033" C_0603 5496.06,5169.29 r90 top
C26 "0,033" C_0603 5633.86,4507.87 r270 bottom
C27 "0,033" C_0603 5496.06,4401.57 r90 top
C28 "0,033" C_0603 5811.02,3736.22 r270 bottom
C29 "0,033" C_0603 5673.23,3629.92 r90 top
C30 "0,1" C_0603 4635.83,5433.07 r180 bottom
C31 "0,1" C_0603 4661.42,5559.06 r0 top
C32 "0,033" C_0603 4649.61,3562.99 r180 bottom
C33 "0,033" C_0603 4649.61,3685.04 r0 top
C34 "0,033" C_0603 5937.01,4980.31 r0 bottom
C35 "0,033" C_0603 5933.07,4744.09 r0 bottom
C36 "0,033" C_0603 5976.38,4208.66 r0 bottom
C37 "0,033" C_0603 5972.44,3972.44 r0 bottom
C38 "0,033" C_0603 6086.61,5744.09 r0 bottom
C39 "0,033" C_0603 6082.68,5507.87 r0 bottom
C40 "0,033" C_0603 5937.01,5362.2 r0 bottom
C41 "0,033" C_0603 5933.07,5125.98 r0 bottom
C42 "0,033" C_0603 5937.01,4594.49 r0 bottom
C43 "0,033" C_0603 5933.07,4358.27 r0 bottom
C44 "0,033" C_0603 6114.17,3822.83 r0 bottom
C45 "0,033" C_0603 6110.24,3586.61 r0 bottom
C46 "0,033" C_0603 4913.39,5570.87 r270 bottom
C47 "0,033" C_0603 4913.39,5574.8 r90 top
C48 "0,033" C_0603 4901.57,3696.85 r90 top
C49 "0,033" C_0603 4901.57,3696.85 r270 bottom
C50 "0,033" C_0603 6173.23,4850.39 r180 bottom
C51 "0,033" C_0603 6173.23,4783.46 r180 bottom
C52 "0,033" C_0603 6212.6,4011.81 r180 bottom
C53 "0,033" C_0603 6212.6,4078.74 r180 bottom
C54 "0,033" C_0603 6322.83,5547.24 r180 bottom
C55 "0,033" C_0603 6324.8,5614.17 r180 bottom
C56 "0,033" C_0603 6173.23,5165.35 r180 bottom
C57 "0,033" C_0603 6173.23,5232.28 r180 bottom
C58 "0,033" C_0603 6173.23,4397.64 r180 bottom
C59 "0,033" C_0603 6173.23,4464.57 r180 bottom
C60 "0,033" C_0603 6350.39,3692.91 r180 bottom
C61 "0,033" C_0603 6350.39,3625.98 r180 bottom
D4 "" SO8 4830.71,5332.68 r0 top
R1 "" R_2512 4901.57,4188.98 r180 bottom
R2 "" R_2512 4901.57,4338.58 r180 bottom
R3 "" R_2512 4901.57,4488.19 r180 bottom
R4 "" R_2512 4901.57,4637.8 r180 bottom
R29 "10" R_0603 5208.66,5673.23 r90 top
R30 "10" R_0603 5161.42,5767.72 r0 top
R31 "10" R_0603 5196.85,3799.21 r90 top
R32 "10" R_0603 5149.61,3893.7 r0 top
R33 "10" R_0603 5440.94,4779.53 r270 bottom
R34 "10" R_0603 5952.76,4716.54 r180 top
R35 "10" R_0603 5480.31,4007.87 r270 bottom
R36 "10" R_0603 6000,3940.94 r180 top
R37 "10" R_0603 5598.43,5543.31 r270 bottom
R38 "10" R_0603 6118.11,5472.44 r180 top
R39 "10" R_0603 5440.94,5161.42 r270 bottom
R40 "10" R_0603 5972.44,5102.36 r180 top
R41 "10" R_0603 5440.94,4393.7 r270 bottom
R42 "10" R_0603 5964.57,4326.77 r180 top
R43 "10" R_0603 5618.11,3622.05 r270 bottom
R44 "10" R_0603 6145.67,3555.12 r180 top
XS1 "ОНП-ЖИ-8-42" X_ONP-JI 6748.03,4177.17 r180 top
XS2 "ОНП-ЖИ-8-42" X_ONP-JI 5964.57,5968.5 r270 top
XS3 "ОНП-ЖИ-8-42" X_ONP-JI 4933.07,3425.2 r90 top
XS4 "ОНП-ЖИ-8-42" X_ONP-JI 4511.81,5216.54 r0 top

## Footprints (in the part's own frame and the unit in brackets; to place one, negate y for a bottom-side part, rotate by r counter-clockwise, add the part's x,y. Pads: shape width x height; smd on the part's side, far side on the other; paste and mask are expansions set on the pad)
C_0603 [mm]
  rect 0.9x1.2 smd: 1(-0.8,0) 2(0.8,0)
  silkscreen extent -1.5,-0.85 1.5,0.85
C_0805 [mm]
  rect 1.1x1.6 smd: 1(-1.05,0) 2(1.05,0)
  silkscreen extent -2.06,-1.11 2.06,1.11
C_1210 [mm]
  rect 1.6x2.7 smd: 1(1.5,0) 2(-1.5,0)
  silkscreen extent -2.6,-1.6 2.6,1.6
C_3216 [mm]
  rect 2x1.2 smd: 1(-1.4,0) 2(1.4,0)
  silkscreen extent -1.7,-0.9 1.7,0.9
C_K1043_64X32 [mm]
  rect 3x3.2 smd: 1(0,-0.1) 2(4,-0.1)
DD_TSOP8 [mm]
  rect 1.5x0.4 smd: 1(0,0) 2(0,-0.65) 3(0,-1.3) 4(0,-1.95) 5(4.8,-1.95) 6(4.8,-1.3) 7(4.8,-0.65) 8(4.8,0)
  silkscreen extent 0.9,-2.55 3.9,0.6
R_0603 [mm]
  rect 0.9x1.2 smd: 1(-0.8,0) 2(0.8,0)
  silkscreen extent -1.5,-0.85 1.5,0.85
R_2512 [mm]
  rect 1.8x3.2 smd: 1(-3.6,0) 2(3.6,0)
  silkscreen extent -3.1,-1.6 3.1,1.6
SO8 [mil]
  rect 80x26 smd: 1(0,0) 2(0,-50) 3(0,-100) 4(0,-150) 5(220,-150) 6(220,-100) 7(220,-50) 8(220,0)
  silkscreen extent -75,25 -50,50
X_JP-PCB1.4 [mm]
  round 0 smd paste-25.4 mask-25.4: 1(-0.5,0) 2(0.5,0)
  Top Layer, Top region: 0.1,-0.7 0.35,-0.7 0.48,-0.68 0.59,-0.64 0.69,-0.58 0.77,-0.52 0.84,-0.45 0.91,-0.35 0.96,-0.23 1,-0.11 1.01,0 1.01,0.06 0.98,0.19 0.93,0.31 0.88,0.39 0.8,0.49 0.72,0.56 0.64,0.61 0.53,0.66 0.43,0.69 0.35,0.7 0.1,0.7
  Top Layer, Top region: -0.1,0.7 -0.35,0.7 -0.48,0.68 -0.59,0.64 -0.69,0.58 -0.77,0.52 -0.84,0.45 -0.91,0.35 -0.96,0.23 -1,0.11 -1.01,0 -1.01,-0.06 -0.98,-0.19 -0.93,-0.31 -0.88,-0.39 -0.8,-0.49 -0.72,-0.56 -0.64,-0.61 -0.53,-0.66 -0.43,-0.69 -0.35,-0.7 -0.1,-0.7
  silkscreen extent -1.21,-0.9 1.21,0.9
X_ONP-JI [mm]
  rrect50% 4x0.9 smd far side: 1(0,-25) 2(0,-23.75) 3(0,-22.5) 4(0,-21.25) 5(0,-20) 6(0,-18.75) 7(0,-17.5) 8(0,-16.25) 9(0,-15) 10(0,-13.75) 11(0,-12.5) 12(0,-11.25) 13(0,-10) 14(0,-8.75) 15(0,-7.5) 16(0,-6.25) 17(0,-5) 18(0,-3.75) 19(0,-2.5) 20(0,-1.25)
  rrect50% 4x0.9 smd: 21(0,-26.25) 22(0,-25) 23(0,-23.75) 24(0,-22.5) 25(0,-21.25) 26(0,-20) 27(0,-18.75) 28(0,-17.5) 29(0,-16.25) 30(0,-15) 31(0,-13.75) 32(0,-12.5) 33(0,-11.25) 34(0,-10) 35(0,-8.75) 36(0,-7.5) 37(0,-6.25) 38(0,-5) 39(0,-3.75) 40(0,-2.5) 41(0,-1.25) 42(0,0)

## Part data
1C1 1C1U 1C2 1C4 1C5 1C6 1C7 1C8 1C9 1C10_ 2C1 2C1U 2C2 2C4 2C5 2C6 2C7 2C8 2C9 2C10 3C1 3C2 3C4 3C5 3C6 3C7 3C8 3C9 3C10 4C1 4C2 4C4 4C5 4C6 4C7 4C8 4C9 4C10 5C1 5C2 5C4 5C5 5C6 5C7 5C8 5C9 5C10 6C1 6C2 6C4 6C5 6C6 6C7 6C8 6C9 6C10 7C1 7C2 7C4 7C5 7C6 7C7 7C8 7C9 7C10 8C1 8C2 8C4 8C5 8C6 8C7 8C8 8C9 8C10 C11 C12 C14 C15 C16 C17 C18 C19 C21 C22 C22_ C23 C24 C25 C26 C27 C28 C29 C30 C31 C32 C33 C34 C35 C36 C37 C38 C39 C40 C41 C42 C43 C44 C45 C46 C47 C48 C49 C50 C51 C52 C53 C54 C55 C56 C57 C58 C59 C60 C61: "0805"

## Free pads (board coordinates)
  round 204.72 hole 110.24: 1(3852.36,3594.49) 1(3852.36,5799.21) 1(6785.43,3653.54) 1(6785.43,5740.16)

## Via types
v1: diameter 27.56, hole 7.87, Top Layer, Top to Bottom Layer, Bottom, 440 vias

## Nets (pads, with @x,y where several pads share a name; then routed paths per layer and width w, separated by ;. In a path a pad name is that pad's centre, name@x,y a point inside that pad or via, vN(x,y) a via of type N, cw(c..) or ccw(c..) an arc to the next point about the centre after c; other vN are vias at no path point)
1KU1: 1R16.2 XS1.2 | length 2651.9
  Mid-Layer 3, Top-Mid w7.87: v1(4561.02,5328.74) 4773.62,5328.74 4773.62,5291.34 5102.36,5287.4 5291.34,5198.82 6017.72,5198.82 6055.12,5236.22 6169.29,5236.22 6238.19,5305.12 6480.31,5305.12 6490.16,5295.28 6490.16,5120.08 v1(6480.31,5110.24)
  Bottom Layer, Bottom w5.91: v1(4561.02,5328.74) 4561.02,5346.46 1R16.2@4614.17,5346.46 ; 1R16.2@4620.08,5352.36 1R16.2@4618.67,5350.96 ; v1(6480.31,5110.24) 6535.43,5055.12 6633.86,5055.12 6688.98,5110.24 6748.03,5110.24 XS1.2@6748.03,5112.2 ; 1R16.2@4614.17,5346.46 1R16.2@4618.11,5346.46 ; 1R16.2@4614.17,5346.46 1R16.2@4618.67,5350.96 ; 1R16.2@4614.17,5346.46 1R16.2@4606.3,5338.58 1R16.2@4618.11,5346.46 ; 1R16.2@4618.11,5346.46 1R16.2@4618.67,5350.96
1KU2: 1R18.2 XS1.3 | length 2620.3
  Top Layer, Top w5.91: v1(4606.3,5281.5) 1R18.2@4624.02,5342.52
  Mid-Layer 3, Top-Mid w7.87: v1(4606.3,5281.5) 4673.23,5281.5 4702.76,5185.04 4923.23,5185.04 4992.13,5200.79 5250,5200.79 5269.69,5181.1 5771.65,5181.1 5816.93,5135.83 6055.12,5135.83 6078.74,5159.45 6118.11,5159.45 6248.03,5289.37 6468.5,5289.37 6474.41,5283.46 6474.41,5147.64 6452.76,5125.98 6452.76,5094.49 v1(6480.31,5066.93)
  Bottom Layer, Bottom w5.91: v1(6480.31,5066.93) 6503.94,5043.31 6641.73,5043.31 6661.42,5062.99 XS1.3@6748.03,5062.99
1KU3: 1R20.2 XS1.4 | length 2756.8
  Mid-Layer 3, Top-Mid w7.87: v1(4830.71,5799.21) 4838.58,5807.09 4919.29,5887.8 5192.91,5887.8 5311.02,5769.69 5311.02,5576.77 5492.13,5395.67 5576.77,5395.67 5590.55,5381.89 5734.25,5381.89 5757.87,5358.27 6141.73,5358.27 6163.39,5336.61 6503.94,5336.61 6521.65,5318.9 6521.65,4994.09 v1(6507.87,4980.31)
  Bottom Layer, Bottom w5.91: 1R20.2@4783.46,5751.97 4787.4,5751.97 4787.4,5755.91 v1(4830.71,5799.21) ; v1(6507.87,4980.31) 6555.12,5027.56 6641.73,5027.56 6657.48,5011.81 6744.09,5011.81 6746.06,5013.78 XS1.4@6748.03,5013.78
1KU4: 1R22.2 XS1.5 | length 2468.7
  Mid-Layer 3, Top-Mid w7.87: v1(4940.94,5712.6) 5031.5,5712.6 5407.48,5336.61 5633.86,5336.61 5657.48,5312.99 5716.54,5312.99 5744.09,5340.55 6131.89,5340.55 6151.57,5320.87 6492.13,5320.87 6505.91,5307.09 6505.91,5021.65 6480.31,4996.06 6480.31,4948.82 6488.19,4940.94 6490.16,4942.91 v1(6490.16,4944.88)
  Bottom Layer, Bottom w5.91: v1(4940.94,5712.6) 4944.88,5716.54 4944.88,5724.41 4964.57,5744.09 1R22.2@4964.57,5751.97 ; v1(6490.16,4944.88) 6511.81,4944.88 6515.75,4940.94 6551.18,4976.38 6629.92,4976.38 6641.73,4964.57 XS1.5@6748.03,4964.57
2KU1: 2R16.2 XS1.7 | length 3419.7
  Mid-Layer 3, Top-Mid w7.87: v1(4525.59,3515.75) 4525.59,3990.16 5041.34,4505.91 5114.17,4574.8 5570.87,4574.8 5657.48,4661.42 5862.2,4661.42 5911.42,4612.2 6127.95,4612.2 6177.17,4562.99 6366.14,4562.99 v1(6429.13,4625.98)
  Bottom Layer, Bottom w5.91: v1(4525.59,3515.75) 4525.59,3429.13 4604.33,3429.13 2R16.2@4604.33,3462.6 ; v1(6429.13,4625.98) 6437.01,4633.86 6437.01,4771.65 6523.62,4858.27 6681.1,4858.27 6688.98,4866.14 XS1.7@6748.03,4866.14
2KU2: 2R18.2 XS1.8 | length 3187.8
  Top Layer, Top w5.91: v1(4555.12,3462.6) 2R18.2@4604.33,3462.6
  Mid-Layer 3, Top-Mid w7.87: v1(4555.12,3462.6) 4555.12,3545.28 4543.31,3574.8 4543.31,3834.65 5147.64,4438.98 5562.99,4438.98 5663.39,4539.37 5700.79,4539.37 5757.87,4596.46 6110.24,4596.46 6165.35,4541.34 6403.54,4541.34 6440.94,4578.74 v1(6437.01,4582.68)
  Bottom Layer, Bottom w5.91: v1(6437.01,4582.68) 6456.69,4602.36 6456.69,4771.65 6501.97,4816.93 XS1.8@6748.03,4816.93
2KU3: 2R20.2 XS1.9 | length 2727.8
  Mid-Layer 3, Top-Mid w7.87: v1(4724.41,3940.94) 5041.34,4257.87 5503.94,4257.87 5559.06,4312.99 5663.39,4312.99 5685.04,4334.65 5685.04,4478.35 5787.4,4580.71 6096.46,4580.71 6151.57,4525.59 6413.39,4525.59 6427.17,4539.37 v1(6448.82,4539.37)
  Bottom Layer, Bottom w5.91: v1(4724.41,3940.94) 4732.28,3933.07 4771.65,3893.7 2R20.2@4771.65,3877.95 ; v1(6448.82,4539.37) 6468.5,4559.06 6468.5,4763.78 6507.87,4803.15 6637.8,4803.15 6673.23,4767.72 XS1.9@6748.03,4767.72
2KU4: 2R22.2 XS1.10 | length 2569.7
  Mid-Layer 3, Top-Mid w7.87: v1(4952.76,3980.32) 4952.76,4055.12 5084.65,4187.01 5458.66,4187.01 5568.9,4297.24 5677.17,4297.24 5716.54,4336.61 5716.54,4484.25 5797.24,4564.96 6086.61,4564.96 6141.73,4509.84 6413.39,4509.84 6429.13,4494.09 6446.85,4494.09 v1(6448.82,4496.06)
  Bottom Layer, Bottom w5.91: 2R22.2@4952.76,3877.95 v1(4952.76,3980.32) ; v1(6448.82,4496.06) 6480.31,4527.56 6480.31,4755.91 6492.13,4767.72 6566.93,4767.72 6586.61,4748.03 6629.92,4748.03 6661.42,4716.54 6748.03,4716.54 XS1.10@6748.03,4718.5
3KU1: 3R16.2 XS1.12 | length 1029.5
  Top Layer, Top w5.91: 3R16.2@6086.61,4996.06 v1(6086.61,5031.5)
  Mid-Layer 3, Top-Mid w7.87: v1(6086.61,5031.5) 6125.98,5070.87 6425.2,5070.87 6460.63,5035.43 6460.63,4923.23 6562.99,4820.87 v1(6562.99,4732.28)
  Bottom Layer, Bottom w5.91: v1(6562.99,4732.28) 6562.99,4716.54 6661.42,4618.11 6748.03,4618.11 XS1.12@6748.03,4620.08
3KU2: 3R18.2 XS1.13 | length 927.8
  Top Layer, Top w5.91: v1(5988.19,4846.46) 6000,4858.27 6031.5,4858.27 3R18.2@6035.43,4862.2
  Mid-Layer 3, Top-Mid w7.87: v1(5988.19,4846.46) 6049.21,4785.43 6407.48,4785.43 v1(6523.62,4669.29)
  Bottom Layer, Bottom w5.91: v1(6523.62,4669.29) 6547.24,4669.29 6641.73,4574.8 6744.09,4574.8 XS1.13@6748.03,4570.87
3KU3: 3R20.2 XS1.14 | length 1053.3
  Top Layer, Top w5.91: 3R20.2@6141.73,4996.06 v1(6141.73,5031.5)
  Mid-Layer 3, Top-Mid w7.87: v1(6141.73,5031.5) 6165.35,5055.12 6413.39,5055.12 6438.98,5029.53 6438.98,4919.29 6535.43,4822.83 6535.43,4722.44 6610.24,4647.64 6610.24,4559.06 v1(6618.11,4551.18)
  Bottom Layer, Bottom w5.91: v1(6618.11,4551.18) 6616.14,4549.21 6645.67,4519.69 6744.09,4519.69 6746.06,4521.65 XS1.14@6748.03,4521.65
3KU4: 3R22.2 XS1.15 | length 1018.2
  Mid-Layer 3, Top-Mid w7.87: v1(6342.52,5027.56) 6407.48,4962.6 6407.48,4927.17 6515.75,4818.9 6515.75,4716.54 6590.55,4641.73 6590.55,4515.75 v1(6618.11,4488.19)
  Bottom Layer, Bottom w5.91: 3R22.2@6133.86,4980.31 6181.1,5027.56 v1(6342.52,5027.56) ; v1(6618.11,4488.19) 6633.86,4472.44 XS1.15@6748.03,4472.44
4KU1: 4R16.2 XS1.17 | length 706.4
  Top Layer, Top w5.91: 4R16.2@6125.98,4220.47 v1(6125.98,4255.91)
  Mid-Layer 3, Top-Mid w7.87: v1(6125.98,4255.91) 6153.54,4283.46 6448.82,4283.46 v1(6511.81,4346.46)
  Bottom Layer, Bottom w5.91: v1(6511.81,4346.46) 6602.36,4346.46 6629.92,4374.02 XS1.17@6748.03,4374.02
4KU2: 4R18.2 XS1.18 | length 1372.1
  Top Layer, Top w5.91: v1(6027.56,4074.8) 6039.37,4086.61 6070.87,4086.61 4R18.2@6074.8,4090.55
  Mid-Layer 3, Top-Mid w7.87: v1(6027.56,4074.8) 6003.94,4051.18 6003.94,3937.01 6023.62,3917.32 6429.13,3917.32 6527.56,4015.75 v1@6527.56,4238.19 ; v1@6527.56,4238.19 6527.56,4242.13 6525.59,4244.09 v1(6519.69,4244.09) 6525.59,4238.19 v1@6527.56,4238.19
  Bottom Layer, Bottom w5.91: v1(6519.69,4244.09) 6519.69,4248.03 6515.75,4248.03 6492.13,4271.65 6492.13,4299.21 6511.81,4318.9 6590.55,4318.9 6610.24,4299.21 6653.54,4299.21 6677.17,4322.83 6748.03,4322.83 XS1.18@6748.03,4324.8
4KU3: 4R20.2 XS1.19 | length 638.9
  Top Layer, Top w5.91: 4R20.2@6181.1,4220.47 v1(6181.1,4255.91)
  Mid-Layer 3, Top-Mid w7.87: v1(6181.1,4255.91) 6492.13,4255.91 v1(6519.69,4283.46)
  Bottom Layer, Bottom w5.91: v1(6519.69,4283.46) 6551.18,4251.97 6610.24,4251.97 6629.92,4271.65 6748.03,4271.65 XS1.19@6748.03,4275.59
4KU4: 4R22.2 XS1.20 | length 629
  Bottom Layer, Bottom w5.91: 4R22.2@6173.23,4208.66 6212.6,4248.03 6476.38,4248.03 6531.5,4192.91 6606.3,4192.91 6637.8,4224.41 6748.03,4224.41 XS1.20@6748.03,4226.38
5KU1: 5R16.2 XS1.23 | length 1190.9
  Top Layer, Top w5.91: 5R16.2@6236.22,5763.78 v1(6236.22,5803.15) ; XS1.23@6744.09,5110.24 XS1.23@6748.03,5112.2
  Top Layer, Top w7.87: v1(6618.11,5110.24) XS1.23@6744.09,5110.24
  Mid-Layer 3, Top-Mid w7.87: v1(6236.22,5803.15) 6242.13,5803.15 6246.06,5803.15 6275.59,5773.62 6539.37,5773.62 6625.98,5687.01 6625.98,5183.07 6618.11,5175.2 6618.11,5118.11 6622.05,5114.17 v1(6618.11,5110.24)
5KU2: 5R18.2 XS1.24 | length 1383
  Top Layer, Top w5.91: v1(6137.8,5610.24) 6149.61,5622.05 6181.1,5622.05 6187.01,5622.05 5R18.2@6190.94,5625.98
  Top Layer, Top w7.87: v1(6596.46,4917.32) 6594.49,4917.32 6592.52,4919.29 6582.68,4929.13 6582.68,5035.43 6610.24,5062.99 XS1.24@6748.03,5062.99
  Mid-Layer 3, Top-Mid w7.87: v1(6137.8,5610.24) 6141.73,5614.17 6149.61,5622.05 6338.58,5622.05 6586.61,5374.02 6586.61,4933.07 6600.39,4919.29 6598.43,4917.32 v1(6596.46,4917.32)
5KU3: 5R20.2 XS1.25 | length 1340.8
  Top Layer, Top w5.91: 5R20.2@6287.4,5748.03 5R20.2@6287.4,5751.97 ; v1(6287.4,5803.15) 5R20.2@6287.4,5751.97 ; 5R20.2@6291.34,5763.78 6287.4,5759.84 5R20.2@6287.4,5751.97 ; XS1.25@6748.03,5011.81 XS1.25@6748.03,5013.78
  Top Layer, Top w7.87: v1(6618.11,5003.94) 6653.54,5003.94 6661.42,5011.81 XS1.25@6748.03,5011.81
  Mid-Layer 3, Top-Mid w7.87: v1(6287.4,5803.15) 6287.4,5811.02 6309.06,5789.37 6547.24,5789.37 6643.7,5692.91 6643.7,5570.87 6673.23,5541.34 6673.23,5059.06 v1(6618.11,5003.94)
5KU4: 5R22.2 XS1.26 | length 1400.9
  Top Layer, Top w5.91: XS1.26@6740.16,4964.57 XS1.26@6748.03,4964.57
  Top Layer, Top w7.87: v1(6618.11,4948.82) 6633.86,4964.57 XS1.26@6740.16,4964.57
  Mid-Layer 3, Top-Mid w7.87: v1(6334.65,5814.96) 6340.55,5809.06 6344.49,5805.12 6557.09,5805.12 6661.42,5700.79 6661.42,5588.58 6688.98,5561.02 6688.98,5019.69 v1(6618.11,4948.82)
  Bottom Layer, Bottom w5.91: 5R22.2@6283.46,5744.09 6283.46,5755.91 6283.46,5759.84 6287.4,5763.78 6338.58,5814.96 v1(6334.65,5814.96)
6KU1: 6R16.2 XS1.28 | length 1214.6
  Top Layer, Top w5.91: 6R16.2@6086.61,5381.89 6086.61,5417.32 v1(6088.58,5419.29)
  Top Layer, Top w7.87: v1(6618.11,4885.83) 6637.8,4866.14 XS1.28@6748.03,4866.14
  Mid-Layer 3, Top-Mid w7.87: v1(6088.58,5419.29) 6120.08,5450.79 6468.5,5450.79 6568.9,5350.39 6568.9,4903.54 6586.61,4885.83 v1(6618.11,4885.83)
6KU2: 6R18.2 XS1.29 | length 1245.9
  Top Layer, Top w5.91: v1(5988.19,5228.35) 6000,5240.16 6031.5,5240.16 6037.4,5240.16 6037.4,5242.13 6R18.2@6035.43,5244.09 ; XS1.29@6748.03,4814.96 XS1.29@6748.03,4816.93
  Top Layer, Top w7.87: v1(6509.84,4911.42) 6533.46,4911.42 6629.92,4814.96 XS1.29@6748.03,4814.96
  Mid-Layer 4, Bop-Mid w5.91: v1@6501.97,4911.42 6509.84,4903.54 v1(6509.84,4911.42)
  Mid-Layer 4, Bop-Mid w7.87: v1(5988.19,5228.35) 5998.03,5248.03 6003.94,5248.03 6019.69,5263.78 6019.69,5299.21 6049.21,5328.74 6106.3,5328.74 6141.73,5293.31 6141.73,5118.11 6196.85,5062.99 6374.02,5062.99 6433.07,5003.94 6433.07,4948.82 6470.47,4911.42 v1@6501.97,4911.42
6KU3: 6R20.2 XS1.30 | length 1213.8
  Top Layer, Top w5.91: 6R20.2@6141.73,5381.89 6141.73,5405.51 v1(6153.54,5417.32)
  Top Layer, Top w7.87: v1(6618.11,4775.59) 6625.98,4767.72 XS1.30@6748.03,4767.72
  Mid-Layer 3, Top-Mid w7.87: v1(6153.54,5417.32) 6153.54,5421.26 6167.32,5435.04 6458.66,5435.04 6553.15,5340.55 6553.15,4893.7 6618.11,4828.74 v1(6618.11,4775.59)
6KU4: 6R22.2 XS1.31 | length 1260.1
  Top Layer, Top w5.91: XS1.31@6748.03,4716.54 XS1.31@6748.03,4718.5
  Top Layer, Top w7.87: v1(6618.11,4704.72) 6629.92,4716.54 XS1.31@6748.03,4716.54
  Mid-Layer 3, Top-Mid w7.87: v1(6342.52,5405.51) 6346.46,5409.45 6352.36,5415.35 6452.76,5415.35 6537.4,5330.71 6537.4,4883.86 6590.55,4830.71 6590.55,4757.87 6618.11,4730.31 v1(6618.11,4704.72)
  Bottom Layer, Bottom w5.91: 6R22.2@6133.86,5362.2 6181.1,5409.45 6338.58,5409.45 v1(6342.52,5405.51)
7KU1: 7R16.2 XS1.33 | length 744.5
  Top Layer, Top w5.91: 7R16.2@6086.61,4606.3 v1(6086.61,4641.73) ; v1(6559.06,4618.11) v1@6570.87,4618.11 ; XS1.33@6748.03,4618.11 XS1.33@6748.03,4620.08
  Top Layer, Top w7.87: v1@6570.87,4618.11 XS1.33@6748.03,4618.11
  Mid-Layer 3, Top-Mid w7.87: v1(6086.61,4641.73) 6090.55,4645.67 6129.92,4685.04 6468.5,4685.04 6535.43,4618.11 v1(6559.06,4618.11)
7KU2: 7R18.2 XS1.34 | length 936.3
  Top Layer, Top w5.91: v1(5988.19,4460.63) 6000,4472.44 7R18.2@6035.43,4472.44
  Top Layer, Top w7.87: v1(6503.94,4543.31) 6547.24,4586.61 6641.73,4586.61 6657.48,4570.87 XS1.34@6748.03,4570.87
  Mid-Layer 3, Top-Mid w7.87: v1(5988.19,4460.63) 6181.1,4460.63 6216.54,4425.2 6377.95,4425.2 6417.32,4464.57 6484.25,4464.57 6501.97,4482.28 6501.97,4537.4 6505.91,4541.34 v1(6503.94,4543.31)
7KU3: 7R20.2 XS1.35 | length 746.4
  Top Layer, Top w5.91: 7R20.2@6141.73,4606.3 v1(6141.73,4641.73) ; XS1.35@6748.03,4519.69 XS1.35@6748.03,4521.65
  Top Layer, Top w7.87: v1(6562.99,4519.69) XS1.35@6748.03,4519.69
  Mid-Layer 3, Top-Mid w7.87: v1(6141.73,4641.73) 6169.29,4669.29 6458.66,4669.29 6562.99,4564.96 v1(6562.99,4519.69) v1@6561.02,4521.65
7KU4: 7R22.2 XS1.36 | length 794.5
  Top Layer, Top w7.87: v1(6543.31,4456.69) 6641.73,4456.69 6657.48,4472.44 XS1.36@6748.03,4472.44
  Mid-Layer 3, Top-Mid w7.87: v1(6244.09,4637.8) 6251.97,4645.67 6259.84,4653.54 6448.82,4653.54 6533.46,4568.9 6533.46,4466.54 v1(6543.31,4456.69)
  Bottom Layer, Bottom w5.91: 7R22.2@6129.92,4590.55 7R22.2@6133.86,4594.49 6133.86,4598.43 6169.29,4633.86 6240.16,4633.86 v1(6244.09,4637.8)
8KU1: 8R16.2 XS1.38 | length 916.4
  Top Layer, Top w5.91: 8R16.2@6263.78,3834.65 v1(6263.78,3870.08)
  Top Layer, Top w7.87: v1(6590.55,4374.02) XS1.38@6748.03,4374.02
  Mid-Layer 3, Top-Mid w7.87: v1(6263.78,3870.08) 6293.31,3899.61 6437.01,3899.61 6547.24,4009.84 6547.24,4330.71 v1(6590.55,4374.02)
8KU2: 8R18.2 XS1.39 | length 1635.1
  Top Layer, Top w5.91: v1(6165.35,3688.98) 6177.17,3700.79 6200.79,3700.79 8R18.2@6218.5,3700.79 ; XS1.39@6748.03,4322.83 XS1.39@6748.03,4324.8
  Top Layer, Top w7.87: v1(6618.11,4326.77) 6622.05,4322.83 XS1.39@6748.03,4322.83
  Mid-Layer 3, Top-Mid w7.87: v1(6165.35,3688.98) 6149.61,3673.23 6149.61,3561.02 6187.01,3523.62 6622.05,3523.62 6641.73,3543.31 6641.73,3830.71 6618.11,3854.33 v1(6618.11,4326.77)
8KU3: 8R20.2 XS1.40 | length 807
  Top Layer, Top w5.91: 8R20.2@6318.9,3834.65 6318.9,3826.77 v1(6318.9,3870.08) ; XS1.40@6748.03,4271.65 XS1.40@6748.03,4275.59
  Top Layer, Top w7.87: v1(6590.55,4279.53) 6598.43,4271.65 XS1.40@6748.03,4271.65
  Mid-Layer 3, Top-Mid w7.87: v1(6318.9,3870.08) 6330.71,3881.89 6448.82,3881.89 6564.96,3998.03 6564.96,4253.94 v1(6590.55,4279.53)
8KU4: 8R22.2 XS1.41 | length 773.8
  Top Layer, Top w5.91: XS1.41@6748.03,4224.41 XS1.41@6748.03,4226.38
  Top Layer, Top w7.87: v1(6590.55,4224.41) XS1.41@6748.03,4224.41
  Mid-Layer 3, Top-Mid w7.87: v1(6480.31,3874.02) 6494.09,3874.02 6590.55,3970.47 v1(6590.55,4224.41)
  Bottom Layer, Bottom w5.91: 8R22.2@6311.02,3842.52 8R22.2@6311.02,3822.83 6314.96,3822.83 6318.9,3826.77 6366.14,3874.02 v1(6480.31,3874.02)
+5V: XS4.14 XS4.15 XS4.35 XS4.36 | length 484.3
  Top Layer, Top w31.5: XS4.35@4511.81,4874.02 XS4.35@4511.81,4872.05 4511.81,4870.08 v1(4618.11,4870.08) v1(4618.11,4921.26) XS4.36@4511.81,4921.26
  Bottom Layer, Bottom w31.5: XS4.14@4511.81,4874.02 XS4.14@4511.81,4872.05 4511.81,4870.08 v1(4618.11,4870.08) ; XS4.15@4511.81,4921.26 v1(4618.11,4921.26)
+12VCH1: R4.1 XS2.23 | length 2183.8
  Top Layer, Top w5.91: v1(4625.98,5850.39) 4618.11,5858.27 4625.98,5858.27 v1@4633.86,5850.39 ; XS2.23@5025.59,5895.67 5029.53,5899.61 5029.53,5903.54 5029.53,5907.48 XS2.23@5029.53,5968.5
  Top Layer, Top w19.68: v1(4625.98,5850.39) 4633.86,5850.39 4980.31,5850.39 XS2.23@5025.59,5895.67 ; v1(4807.09,4901.57) 4807.09,4850.39 4858.27,4799.21 4858.27,4708.66 4921.26,4645.67 v1(4984.25,4645.67)
  Mid-Layer 4, Bop-Mid w19.68: v1(4625.98,5850.39) 4590.55,5885.83 4539.37,5885.83 4496.06,5842.52 4496.06,5293.31 4807.09,4982.28 v1(4807.09,4901.57)
  Bottom Layer, Bottom w19.68: v1(4984.25,4645.67) 5035.43,4645.67 R4.1@5043.31,4637.8
+12VCH2: R3.1 XS2.29 | length 2443.3
  Top Layer, Top w5.91: XS2.29@5320.87,5895.67 5324.8,5899.61 5328.74,5899.61 XS2.29@5326.77,5901.57 ; XS2.29@5324.8,5968.5 5324.8,5966.54 XS2.29@5328.74,5966.54
  Top Layer, Top w19.68: XS2.29@5320.87,5895.67 5350.39,5866.14 v1(5350.39,5846.46) ; XS2.29@5326.77,5901.57 XS2.29@5328.74,5966.54
  Mid-Layer 4, Bop-Mid w19.68: v1(5114.17,4496.06) 5114.17,4570.87 5082.68,4602.36 5082.68,4767.72 5147.64,4832.68 5147.64,5049.21 5112.2,5084.65 4793.31,5084.65 4700.79,5177.17 4700.79,5285.43 4748.03,5332.68 4748.03,5334.65 4994.09,5334.65 5137.8,5478.35 5137.8,5681.1 5192.91,5736.22 5277.56,5736.22 5350.39,5809.06 v1(5350.39,5846.46) v1@5348.43,5844.49
  Bottom Layer, Bottom w19.68: R3.1@5043.31,4496.06 v1(5114.17,4496.06)